# Altium PCB praline.PcbDoc (part 1 of 6)
Units mm, origin at the board's own origin, x right, y up, seen from the top; angles counter-clockwise.
Board outline 120 x 75 mm, 6 copper layers (F.Cu, In1.Cu, In2.Cu, In3.Cu, In4.Cu, B.Cu); 576 components, 429 nets, 2806 pads, 953 vias.
Unrouted connection lines stored in the file: 268.
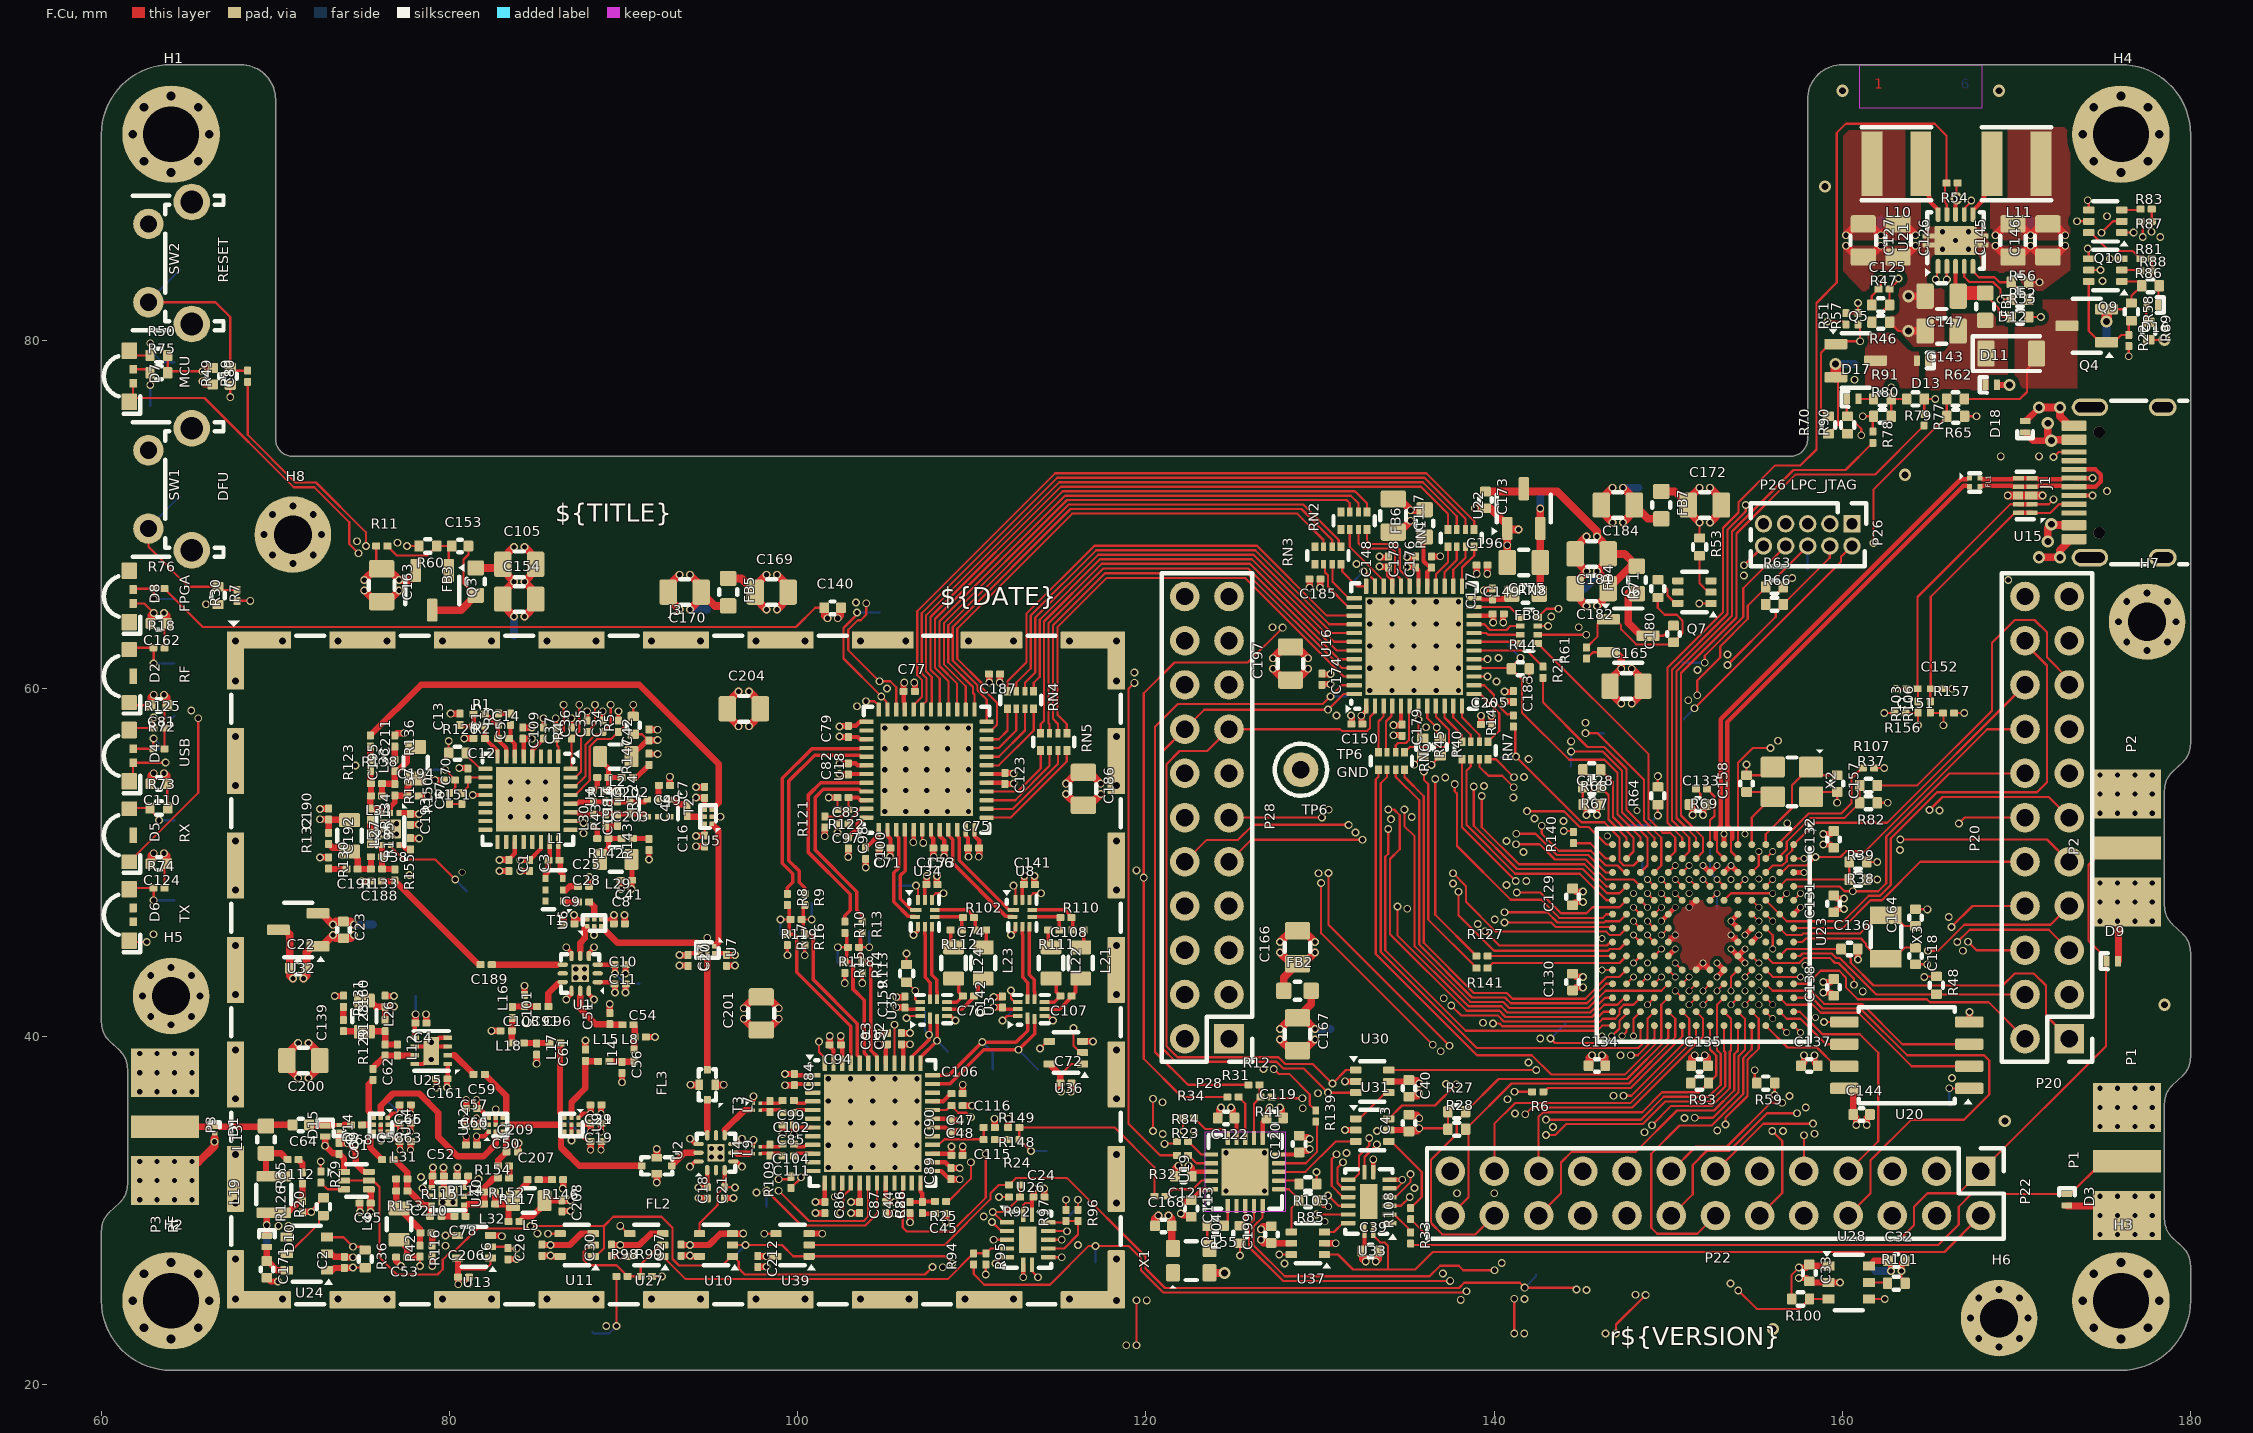
[diagram p0: F.Cu view]
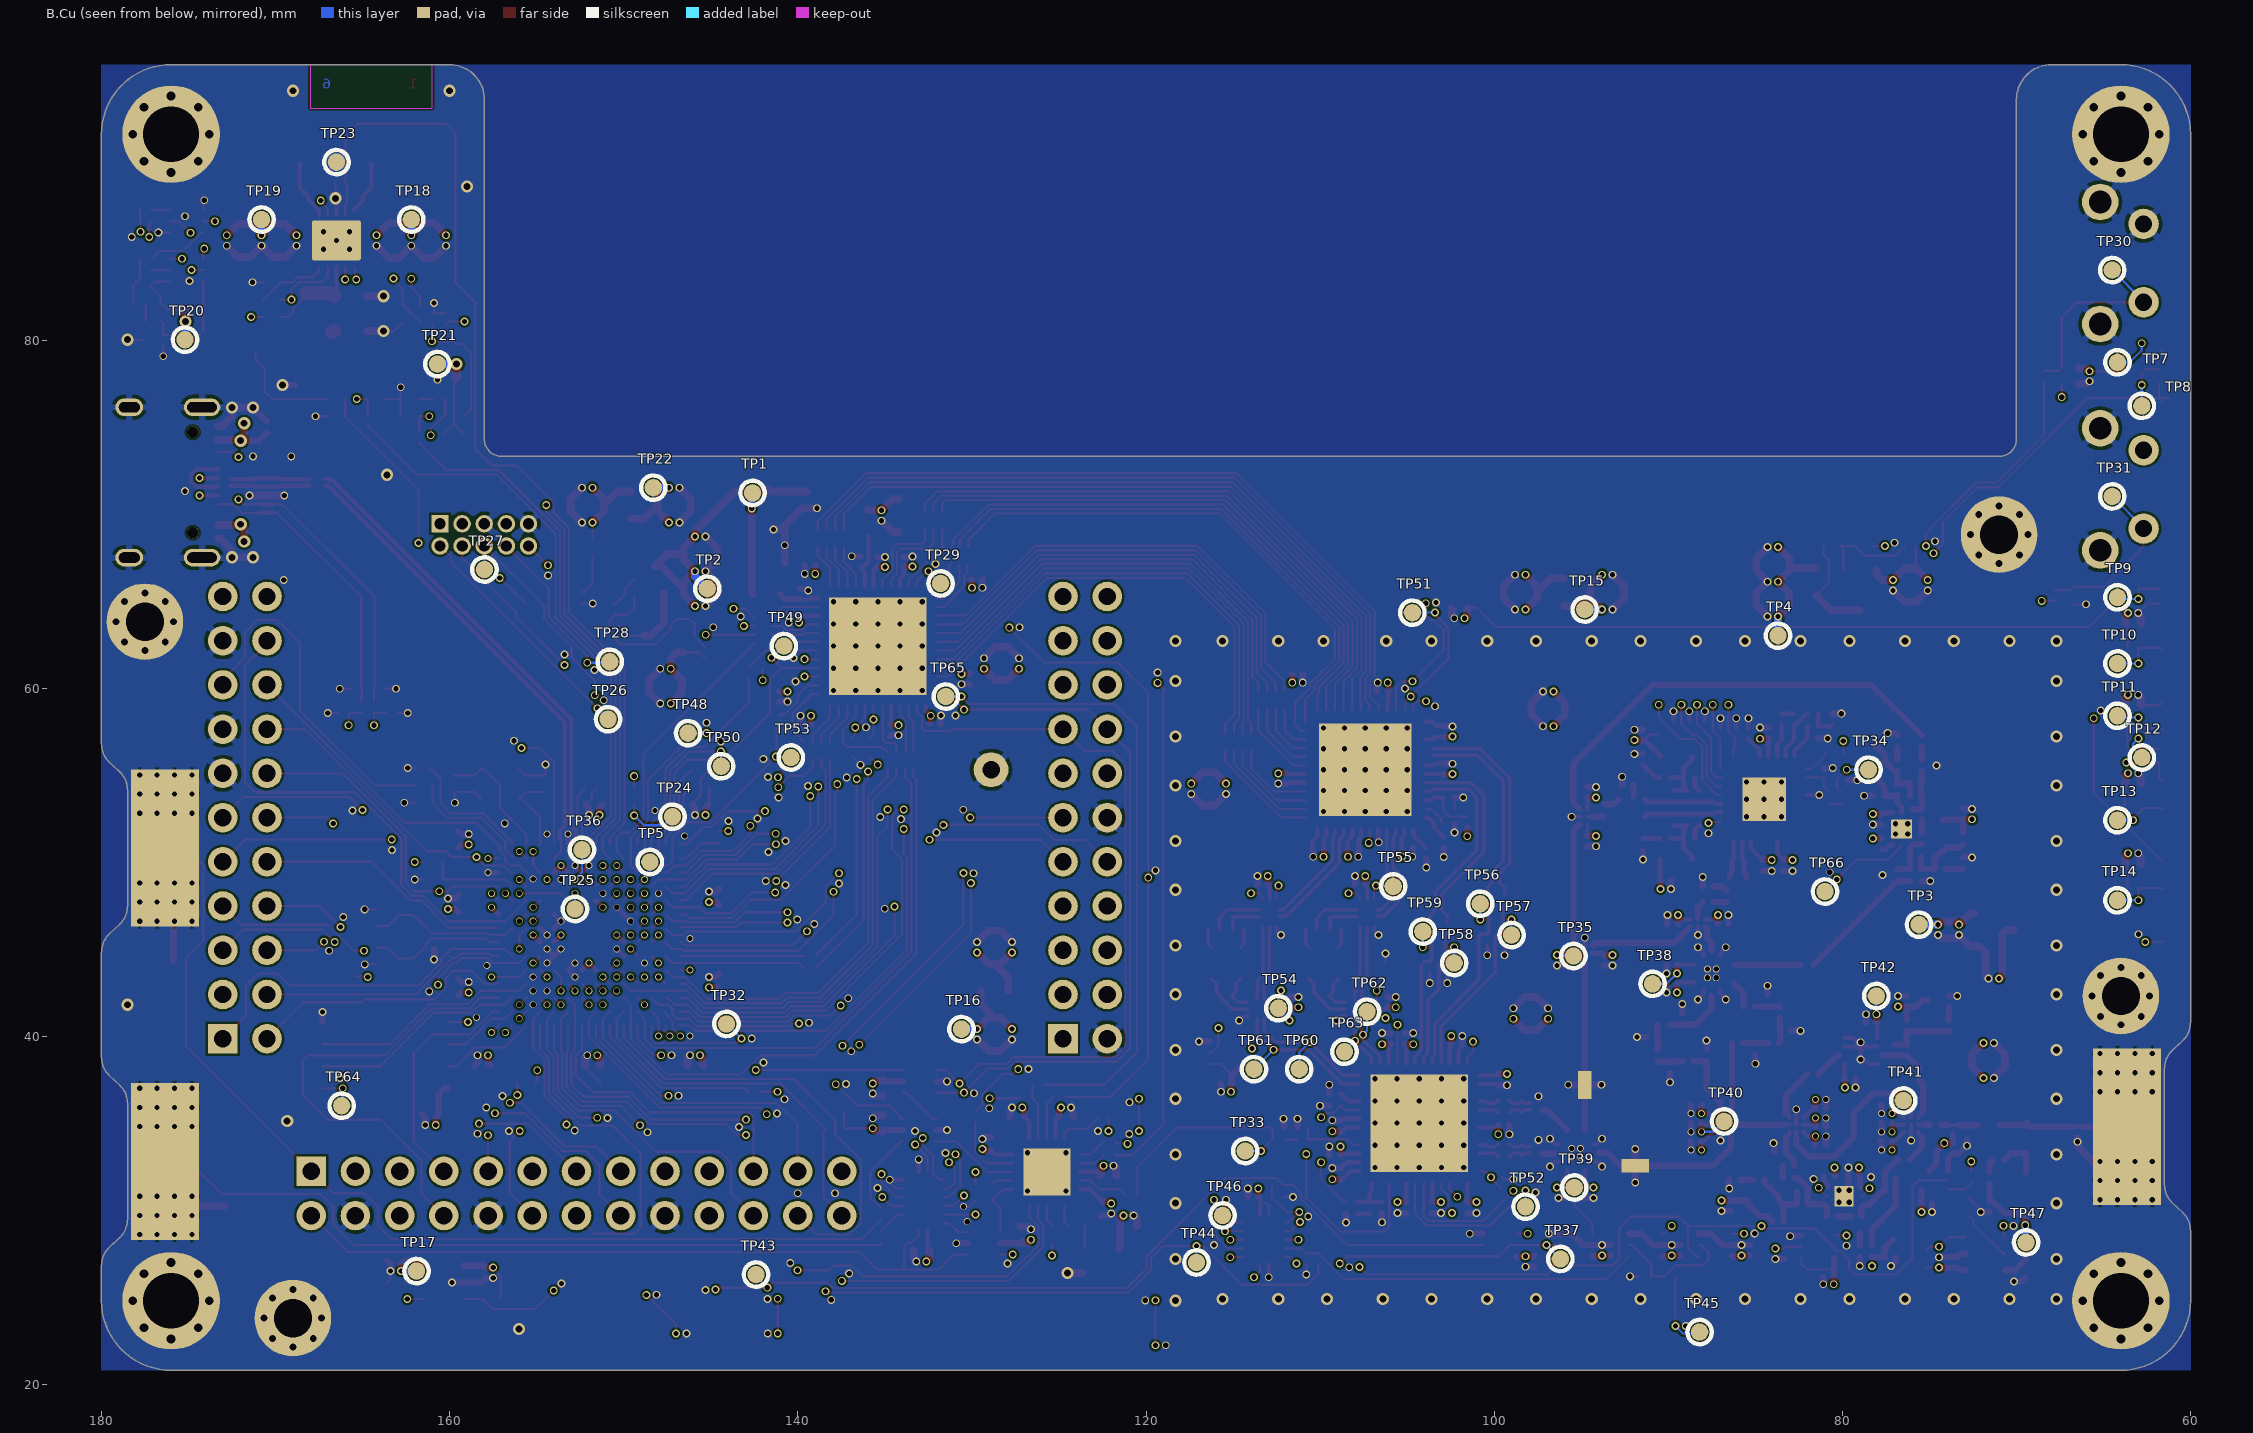
[diagram p1: B.Cu view, seen from below]
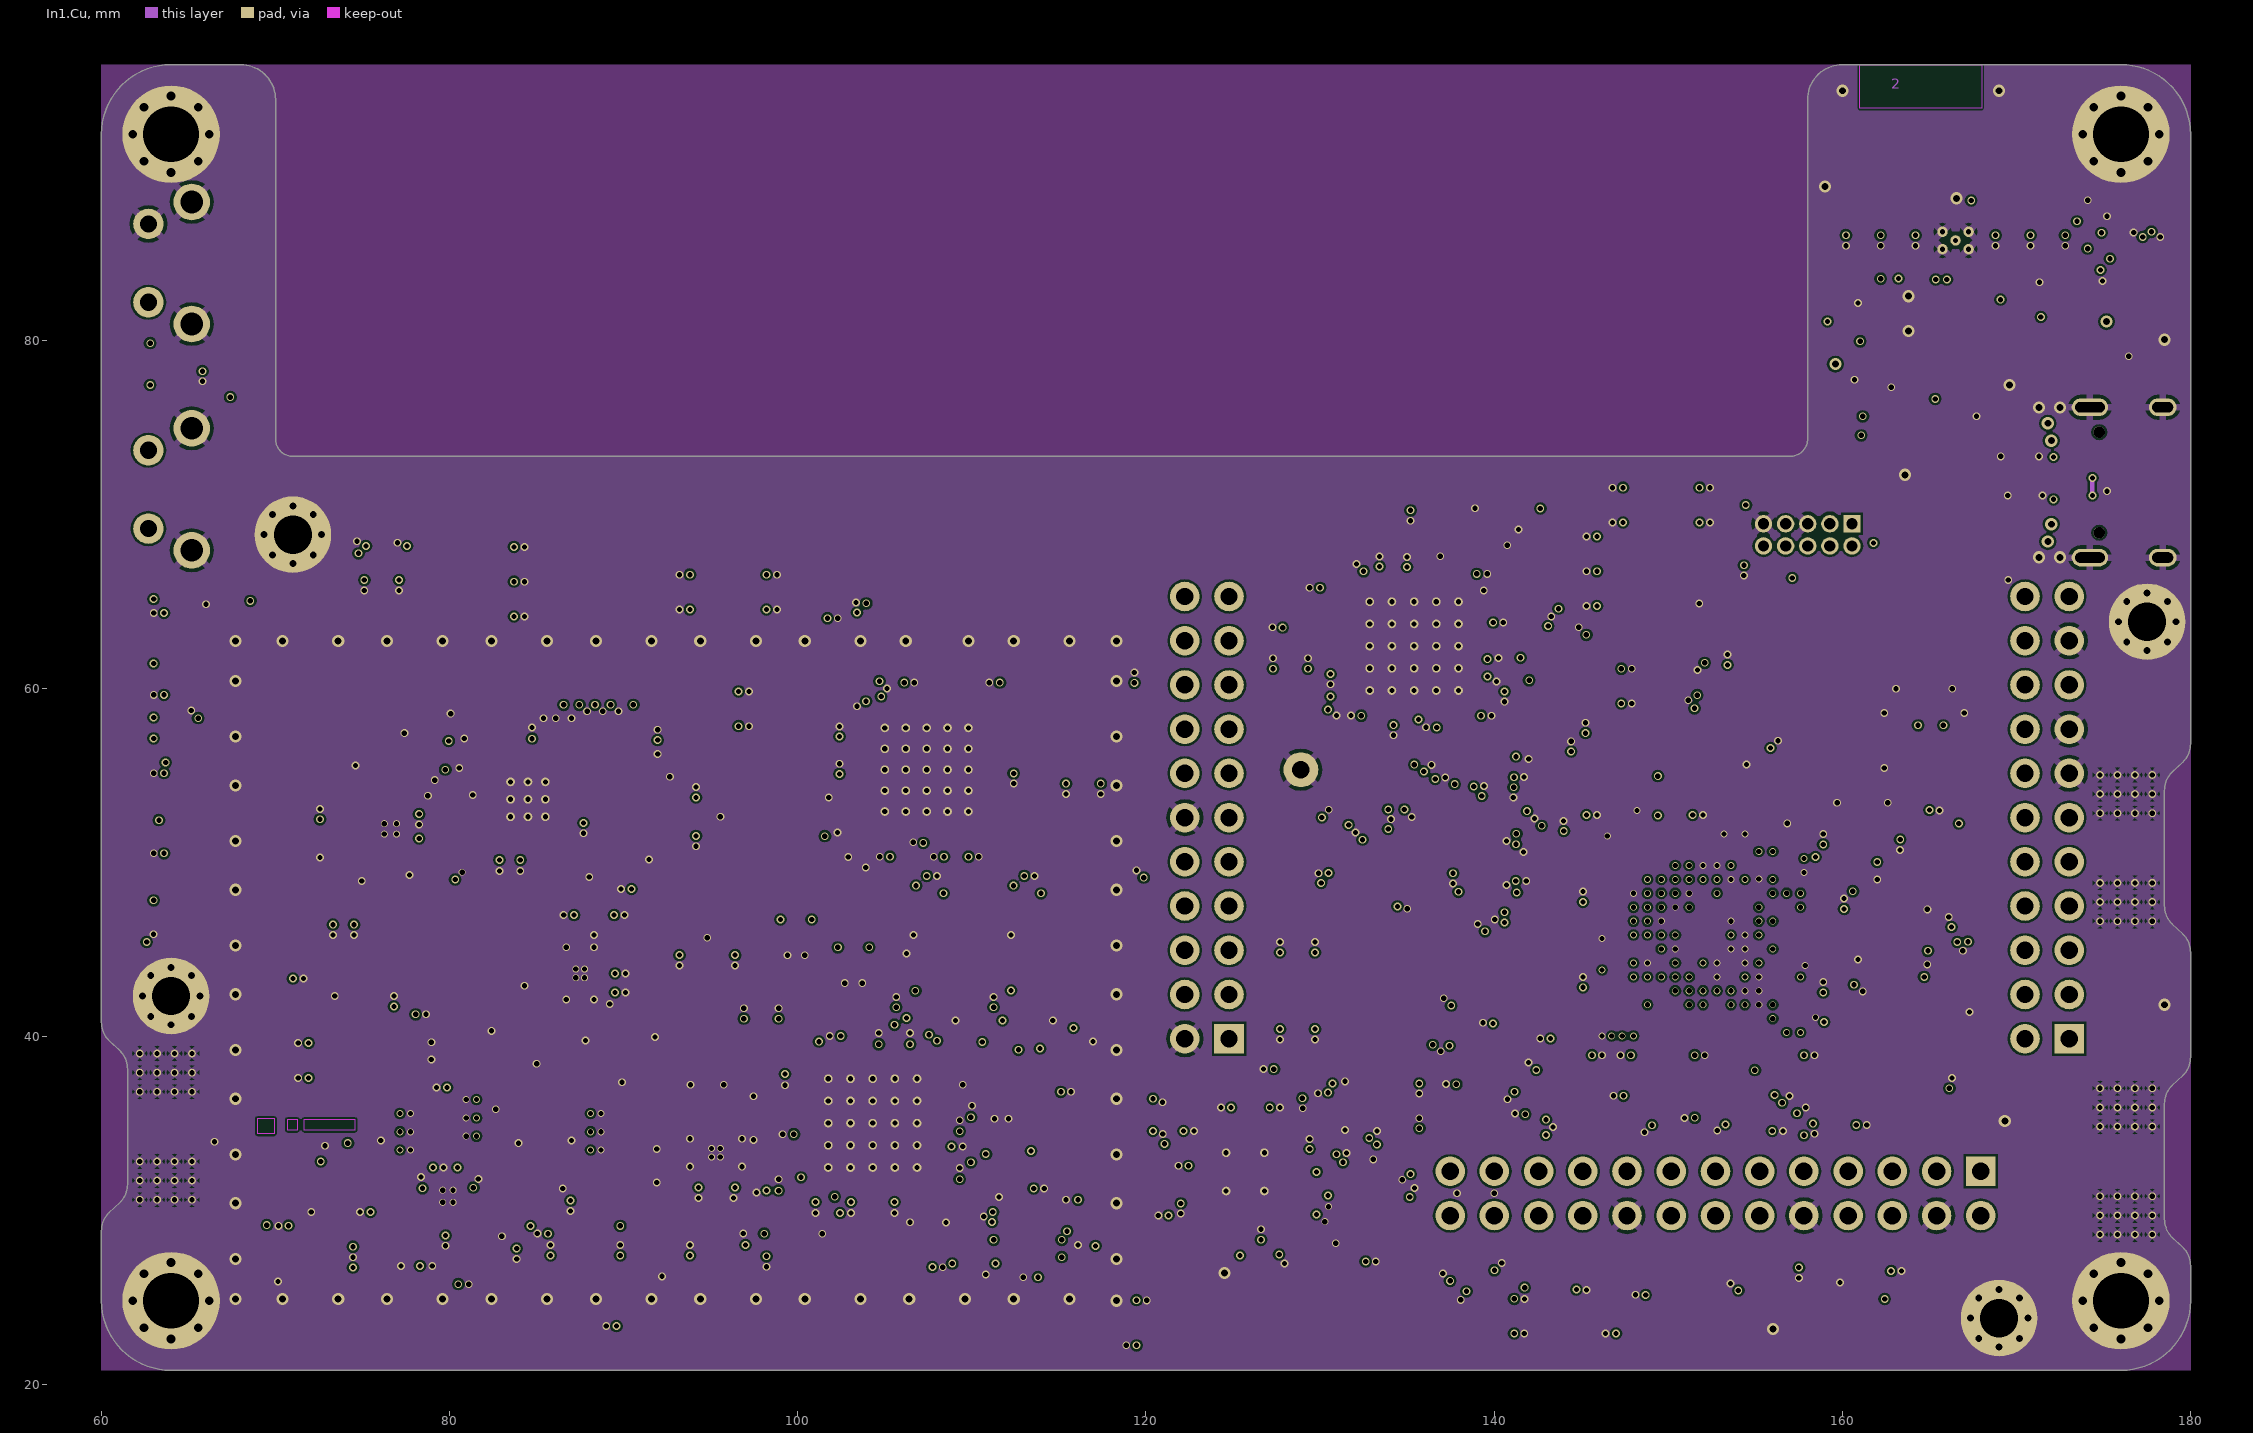
[diagram p2: In1.Cu]
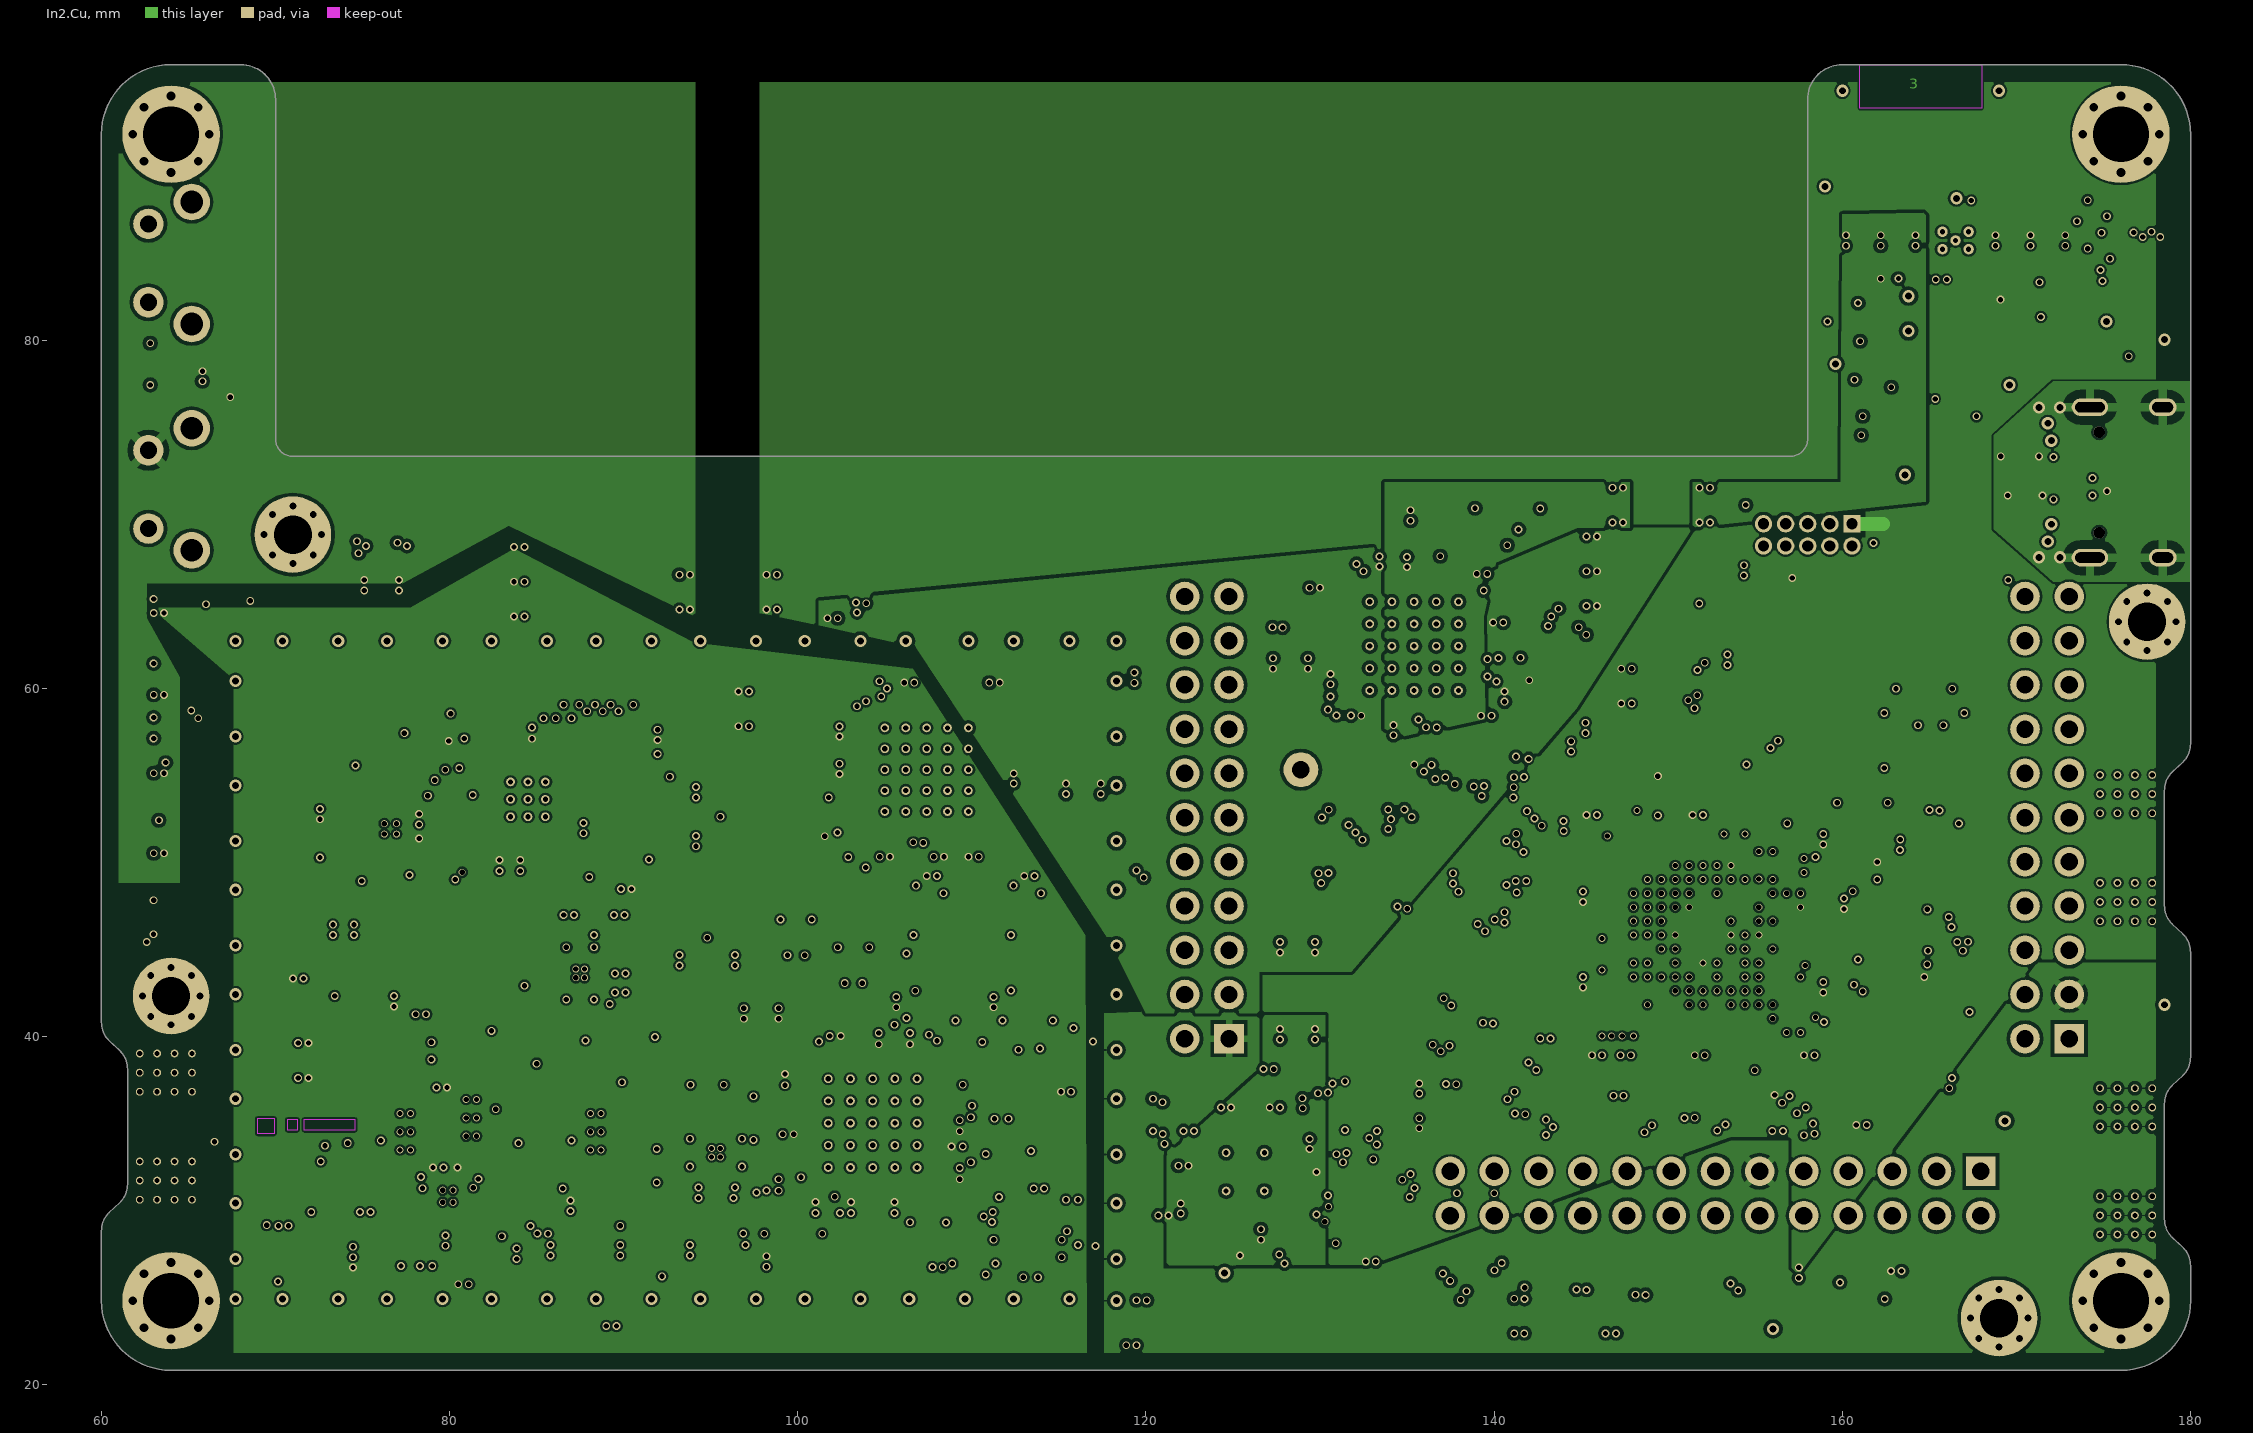
[diagram p3: In2.Cu]
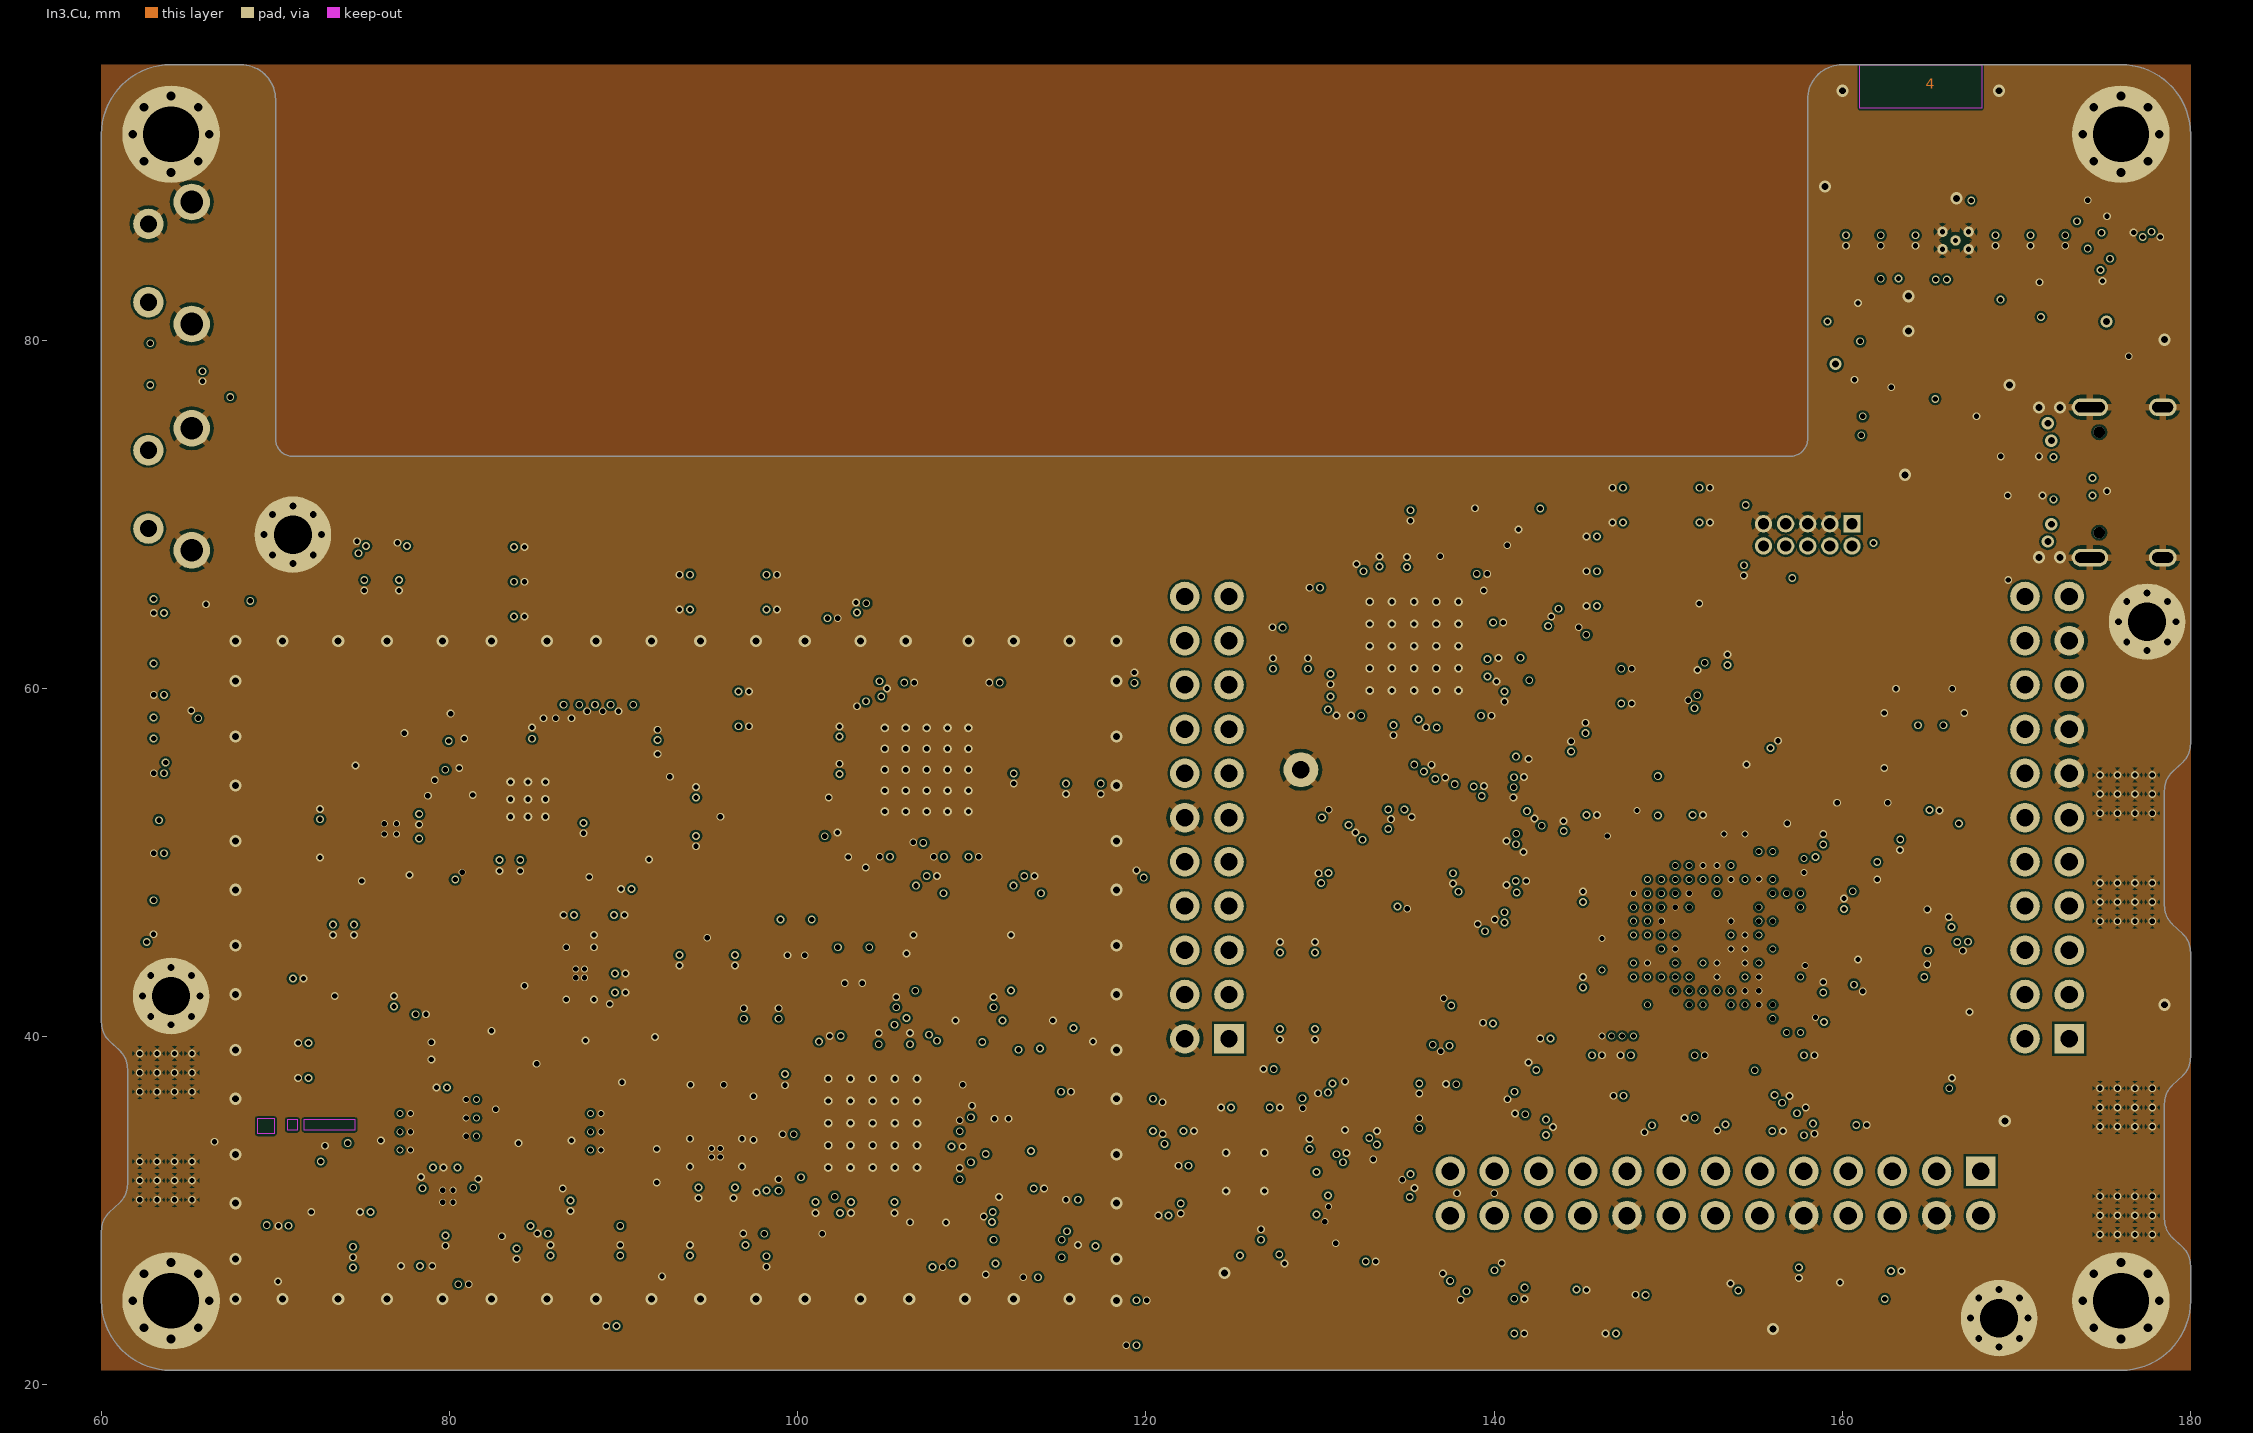
[diagram p4: In3.Cu]
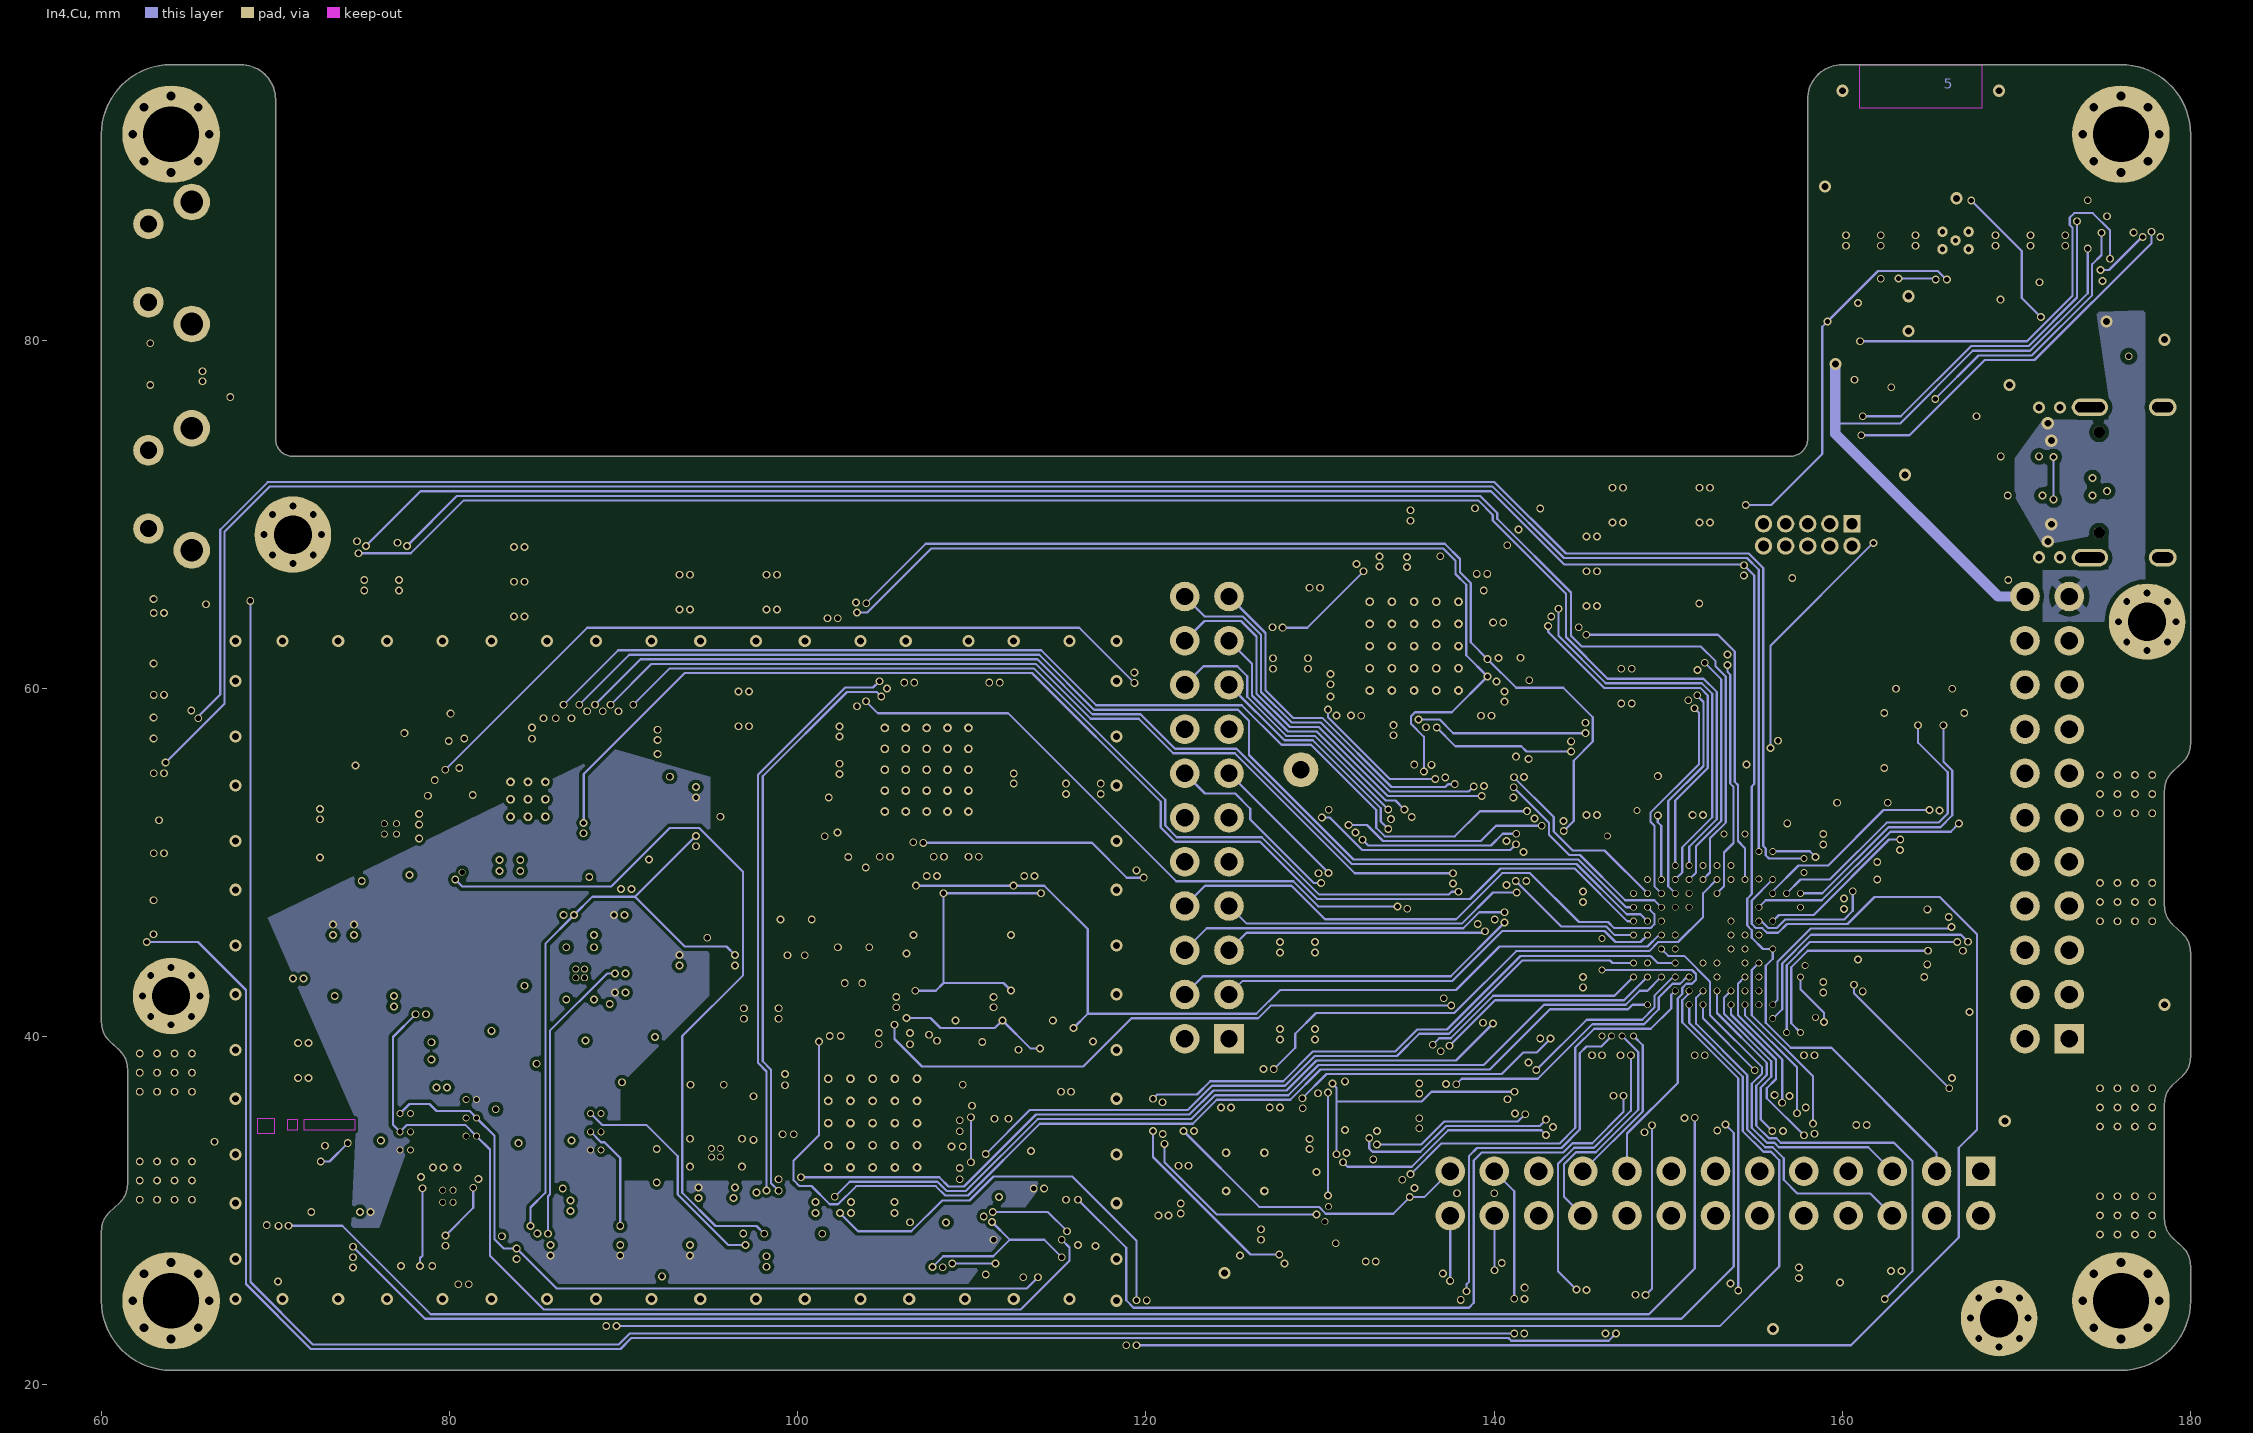
[diagram p5: In4.Cu]

## Layer stack, top to bottom
F.Mask: solder mask 0.0102, Solder Resist, Dk 3.5
F.Cu: signal copper 0.0356
Dielectric3: dielectric 0.32, FR-4, Dk 4.8
In1.Cu: signal copper 0.0356
Dielectric 1: dielectric 0.32, FR-4, Dk 4.8
In2.Cu: signal copper 0.0356
Dielectric2: dielectric 0.32, FR-4, Dk 4.8
In3.Cu: signal copper 0.0356
Dielectric4: dielectric 0.32, FR-4, Dk 4.8
In4.Cu: signal copper 0.0356
Dielectric5: dielectric 0.32, FR-4, Dk 4.8
B.Cu: signal copper 0.0356
B.Mask: solder mask 0.0102, Solder Resist, Dk 3.5

## Board outline
60,28.82 cw(c61.5,28.82) 60.439,29.881 61.061,30.459 ccw(c60,31.52) 61.5,31.52 61.5,38.12 ccw(c60,38.12) 61.061,39.181 60.439,39.759 cw(c61.5,40.82) 60,40.82 60,91.82 cw(c64,91.82) 64,95.82 68,95.82 cw(c68,93.82) 70,93.82 70,74.32 ccw(c71,74.32) 71,73.32 157,73.32 ccw(c157,74.32) 158,74.32 158,93.82 cw(c160,93.82) 160,95.82 176,95.82 cw(c176,91.82) 180,91.82 180,56.82 cw(c178.5,56.82) 179.561,55.759 178.939,55.181 ccw(c180,54.12) 178.5,54.12 178.5,47.52 ccw(c180,47.52) 178.939,46.459 179.561,45.881 cw(c178.5,44.82) 180,44.82 180,38.82 cw(c178.5,38.82) 179.561,37.759 178.939,37.181 ccw(c180,36.12) 178.5,36.12 178.5,29.52 ccw(c180,29.52) 178.939,28.459 179.561,27.881 cw(c178.5,26.82) 180,26.82 180,24.82 cw(c176,24.82) 176,20.82 64,20.82 cw(c64,24.82) 60,24.82

## Design rules (kind name [scope] priority, off if disabled: settings)
Clearance "Clearence 0.5_PadClass" [InPadClass('Pad Class Clearance 0.5')] p1: gap=0.5 ignorepadtopadclearanceinfootprint=FALSE
Clearance "Clearence 0.3_Polygon" [InNamedPolygon('F.Cu-VCC') OR InNamedPolygon('F.Cu-+1V2') OR InNamedPolygon('F.Cu-GND')] p2: gap=0.3 ignorepadtopadclearanceinfootprint=FALSE
Clearance "Clearence 0.25_Polygon" [InNamedPolygon('F.Cu-Net-(D13-A)') OR InNamedPolygon('F.Cu-Net-(D11-K)') OR InNamedPolygon('F.Cu-/Microcontroller/VBUS_SAFE') OR InNamedPolygon('In4.Cu-/Power/VBUS')] p3: gap=0.25 ignorepadtopadclearanceinfootprint=FALSE
Clearance "Clearence 0.2_Polygon" [InNamedPolygon('F.Cu-VCC-1') OR InNamedPolygon('In2.Cu-3V3AUX') OR InNamedPolygon('In2.Cu-+1V2') OR InNamedPolygon('In2.Cu-3V3LED') OR InNamedPolygon('In2.Cu-1V2FPGA') OR InNamedPolygon('In2.Cu-3V3CLK') OR InNamedPolygon('In2.Cu-3V3FPGA') OR InNamedPolygon('In4.Cu-2V5RF')] p4: gap=0.2 ignorepadtopadclearanceinfootprint=FALSE
Clearance "Clearence 0.127_Polygon" [InNamedPolygon('B.Cu-GND') OR InNamedPolygon('In1.Cu-GND') OR InNamedPolygon('In3.Cu-GND') OR InNamedPolygon('In2.Cu-VCC') OR InNamedPolygon('In2.Cu-VAA') OR InNamedPolygon('In2.Cu-GND')] p5: gap=0.127 ignorepadtopadclearanceinfootprint=FALSE
Clearance "Clearence 0.127_NetClass" [InNetClass('Default') OR InNetClass('diff100') OR InNetClass('diff90')] p6: gap=0.127 ignorepadtopadclearanceinfootprint=FALSE
Clearance "Clearence 0.05_PadClass" [InPadClass('Pad Class Clearance 0.05')] p7: gap=0.05 ignorepadtopadclearanceinfootprint=FALSE
Clearance "Clearence 0.04_PadClass" [InPadClass('Pad Class Clearance 0.04')] p8: gap=0.04 ignorepadtopadclearanceinfootprint=FALSE
HoleSize HoleSize_MT-Hole [InComponentClass('CC-MT-HOLE')] p1: absolutevalues=TRUE maxlimit=4 minlimit=0.254 maxpercent=80.000 minpercent=20.000
HoleSize [All] p2: absolutevalues=TRUE maxlimit=2.54 minlimit=0.025 maxpercent=80.000 minpercent=20.000
HoleToHoleClearance HoleToHoleClearance_1 [IsComponentPad] p1: gap=0.2 allowstackedmicrovias=TRUE
HoleToHoleClearance [All] p2: gap=0.254 allowstackedmicrovias=TRUE
MinimumSolderMaskSliver [All] p1: minsoldermaskwidth=0
PolygonConnect Polygon_In4.Cu-2V5RF_ConnectDirect [IsNamedPolygon('In4.Cu-2V5RF') vs IsVia or IsSMTPin] p1: connectstyle=Direct reliefconductorwidth=0.254 reliefentries=4 polygonreliefangle="90 Angle" airgapwidth=0.254
PolygonConnect Polygon_In4.Cu-2V5RF_ConnectRelief45 [IsNamedPolygon('In4.Cu-2V5RF') vs IsThruPin and (PadShape_AllLayers = 'Round')] p2: connectstyle=Relief reliefconductorwidth=0.5 reliefentries=4 polygonreliefangle="45 Angle" airgapwidth=0.5
PolygonConnect Polygon_In4.Cu-2V5RF_ConnectRelief90 [IsNamedPolygon('In4.Cu-2V5RF') vs IsThruPin and (PadShape_AllLayers <> 'Round')] p3: connectstyle=Relief reliefconductorwidth=0.5 reliefentries=4 polygonreliefangle="90 Angle" airgapwidth=0.5
PolygonConnect Polygon_In4.Cu-/Power/VBUS_ConnectDirect [IsNamedPolygon('In4.Cu-/Power/VBUS') vs IsVia] p4: connectstyle=Direct reliefconductorwidth=0.254 reliefentries=4 polygonreliefangle="90 Angle" airgapwidth=0.254
PolygonConnect Polygon_In4.Cu-/Power/VBUS_ConnectRelief45 [IsNamedPolygon('In4.Cu-/Power/VBUS') vs (IsThruPin or IsSMTPin) and (PadShape_AllLayers = 'Round')] p5: connectstyle=Relief reliefconductorwidth=0.5 reliefentries=4 polygonreliefangle="45 Angle" airgapwidth=0.3
PolygonConnect Polygon_In4.Cu-/Power/VBUS_ConnectRelief90 [IsNamedPolygon('In4.Cu-/Power/VBUS') vs (IsThruPin or IsSMTPin) and (PadShape_AllLayers <> 'Round')] p6: connectstyle=Relief reliefconductorwidth=0.5 reliefentries=4 polygonreliefangle="90 Angle" airgapwidth=0.3
PolygonConnect Polygon_In2.Cu-3V3FPGA_ConnectDirect [IsNamedPolygon('In2.Cu-3V3FPGA') vs IsVia] p7: connectstyle=Direct reliefconductorwidth=0.254 reliefentries=4 polygonreliefangle="90 Angle" airgapwidth=0.254
PolygonConnect Polygon_In2.Cu-3V3FPGA_ConnectRelief45 [IsNamedPolygon('In2.Cu-3V3FPGA') vs (IsThruPin or IsSMTPin) and (PadShape_AllLayers = 'Round')] p8: connectstyle=Relief reliefconductorwidth=0.5 reliefentries=4 polygonreliefangle="45 Angle" airgapwidth=0.5
PolygonConnect Polygon_In2.Cu-3V3FPGA_ConnectRelief90 [IsNamedPolygon('In2.Cu-3V3FPGA') vs (IsThruPin or IsSMTPin) and (PadShape_AllLayers <> 'Round')] p9: connectstyle=Relief reliefconductorwidth=0.5 reliefentries=4 polygonreliefangle="90 Angle" airgapwidth=0.5
PolygonConnect Polygon_In2.Cu-3V3CLK_ConnectDirect [IsNamedPolygon('In2.Cu-3V3CLK') vs IsVia] p10: connectstyle=Direct reliefconductorwidth=0.254 reliefentries=4 polygonreliefangle="90 Angle" airgapwidth=0.254
PolygonConnect Polygon_In2.Cu-3V3CLK_ConnectRelief45 [IsNamedPolygon('In2.Cu-3V3CLK') vs (IsThruPin or IsSMTPin) and (PadShape_AllLayers = 'Round')] p11: connectstyle=Relief reliefconductorwidth=0.5 reliefentries=4 polygonreliefangle="45 Angle" airgapwidth=0.5
PolygonConnect Polygon_In2.Cu-3V3CLK_ConnectRelief90 [IsNamedPolygon('In2.Cu-3V3CLK') vs (IsThruPin or IsSMTPin) and (PadShape_AllLayers <> 'Round')] p12: connectstyle=Relief reliefconductorwidth=0.5 reliefentries=4 polygonreliefangle="90 Angle" airgapwidth=0.5
PolygonConnect Polygon_In2.Cu-1V2FPGA_ConnectDirect [IsNamedPolygon('In2.Cu-1V2FPGA') vs IsVia] p13: connectstyle=Direct reliefconductorwidth=0.254 reliefentries=4 polygonreliefangle="90 Angle" airgapwidth=0.254
PolygonConnect Polygon_In2.Cu-1V2FPGA_ConnectRelief45 [IsNamedPolygon('In2.Cu-1V2FPGA') vs (IsThruPin or IsSMTPin) and (PadShape_AllLayers = 'Round')] p14: connectstyle=Relief reliefconductorwidth=0.5 reliefentries=4 polygonreliefangle="45 Angle" airgapwidth=0.5
PolygonConnect Polygon_In2.Cu-1V2FPGA_ConnectRelief90 [IsNamedPolygon('In2.Cu-1V2FPGA') vs (IsThruPin or IsSMTPin) and (PadShape_AllLayers <> 'Round')] p15: connectstyle=Relief reliefconductorwidth=0.5 reliefentries=4 polygonreliefangle="90 Angle" airgapwidth=0.5
PolygonConnect Polygon_In2.Cu-3V3LED_ConnectDirect [IsNamedPolygon('In2.Cu-3V3LED') vs IsVia] p16: connectstyle=Direct reliefconductorwidth=0.254 reliefentries=4 polygonreliefangle="90 Angle" airgapwidth=0.254
PolygonConnect Polygon_In2.Cu-3V3LED_ConnectRelief45 [IsNamedPolygon('In2.Cu-3V3LED') vs (IsThruPin or IsSMTPin) and (PadShape_AllLayers = 'Round')] p17: connectstyle=Relief reliefconductorwidth=0.508 reliefentries=4 polygonreliefangle="45 Angle" airgapwidth=0.305
PolygonConnect Polygon_In2.Cu-3V3LED_ConnectRelief90 [IsNamedPolygon('In2.Cu-3V3LED') vs (IsThruPin or IsSMTPin) and (PadShape_AllLayers <> 'Round')] p18: connectstyle=Relief reliefconductorwidth=0.508 reliefentries=4 polygonreliefangle="90 Angle" airgapwidth=0.305
PolygonConnect Polygon_In2.Cu-GND_ConnectDirect [IsNamedPolygon('In2.Cu-GND') vs IsVia or IsSMTPin] p19: connectstyle=Direct reliefconductorwidth=0.254 reliefentries=4 polygonreliefangle="90 Angle" airgapwidth=0.254
PolygonConnect Polygon_In2.Cu-GND_ConnectRelief45 [IsNamedPolygon('In2.Cu-GND') vs IsThruPin and (PadShape_AllLayers = 'Round')] p20: connectstyle=Relief reliefconductorwidth=0.5 reliefentries=4 polygonreliefangle="45 Angle" airgapwidth=0.5
PolygonConnect Polygon_In2.Cu-GND_ConnectRelief90 [IsNamedPolygon('In2.Cu-GND') vs IsThruPin and (PadShape_AllLayers <> 'Round')] p21: connectstyle=Relief reliefconductorwidth=0.5 reliefentries=4 polygonreliefangle="90 Angle" airgapwidth=0.5
PolygonConnect Polygon_In2.Cu-+1V2_ConnectDirect [IsNamedPolygon('In2.Cu-+1V2') vs IsVia] p22: connectstyle=Direct reliefconductorwidth=0.254 reliefentries=4 polygonreliefangle="90 Angle" airgapwidth=0.254
PolygonConnect Polygon_In2.Cu-+1V2_ConnectRelief45 [IsNamedPolygon('In2.Cu-+1V2') vs (IsThruPin or IsSMTPin) and (PadShape_AllLayers = 'Round')] p23: connectstyle=Relief reliefconductorwidth=0.5 reliefentries=4 polygonreliefangle="45 Angle" airgapwidth=0.5
PolygonConnect Polygon_In2.Cu-+1V2_ConnectRelief90 [IsNamedPolygon('In2.Cu-+1V2') vs (IsThruPin or IsSMTPin) and (PadShape_AllLayers <> 'Round')] p24: connectstyle=Relief reliefconductorwidth=0.5 reliefentries=4 polygonreliefangle="90 Angle" airgapwidth=0.5
PolygonConnect Polygon_In2.Cu-3V3AUX_ConnectDirect [IsNamedPolygon('In2.Cu-3V3AUX') vs IsVia or IsSMTPin] p25: connectstyle=Direct reliefconductorwidth=0.254 reliefentries=4 polygonreliefangle="90 Angle" airgapwidth=0.254
PolygonConnect Polygon_In2.Cu-3V3AUX_ConnectRelief45 [IsNamedPolygon('In2.Cu-3V3AUX') vs IsThruPin and (PadShape_AllLayers = 'Round')] p26: connectstyle=Relief reliefconductorwidth=0.4 reliefentries=4 polygonreliefangle="45 Angle" airgapwidth=0.2
PolygonConnect Polygon_In2.Cu-3V3AUX_ConnectRelief90 [IsNamedPolygon('In2.Cu-3V3AUX') vs IsThruPin and (PadShape_AllLayers <> 'Round')] p27: connectstyle=Relief reliefconductorwidth=0.4 reliefentries=4 polygonreliefangle="90 Angle" airgapwidth=0.2
PolygonConnect Polygon_In2.Cu-VAA_ConnectDirect [IsNamedPolygon('In2.Cu-VAA') vs IsVia] p28: connectstyle=Direct reliefconductorwidth=0.254 reliefentries=4 polygonreliefangle="90 Angle" airgapwidth=0.254
PolygonConnect Polygon_In2.Cu-VAA_ConnectRelief45 [IsNamedPolygon('In2.Cu-VAA') vs (IsThruPin or IsSMTPin) and (PadShape_AllLayers = 'Round')] p29: connectstyle=Relief reliefconductorwidth=0.508 reliefentries=4 polygonreliefangle="45 Angle" airgapwidth=0.305
PolygonConnect Polygon_In2.Cu-VAA_ConnectRelief90 [IsNamedPolygon('In2.Cu-VAA') vs (IsThruPin or IsSMTPin) and (PadShape_AllLayers <> 'Round')] p30: connectstyle=Relief reliefconductorwidth=0.508 reliefentries=4 polygonreliefangle="90 Angle" airgapwidth=0.305
PolygonConnect Polygon_In2.Cu-VCC_ConnectDirect [IsNamedPolygon('In2.Cu-VCC') vs IsVia] p31: connectstyle=Direct reliefconductorwidth=0.254 reliefentries=4 polygonreliefangle="90 Angle" airgapwidth=0.254
PolygonConnect Polygon_In2.Cu-VCC_ConnectRelief45 [IsNamedPolygon('In2.Cu-VCC') vs (IsThruPin or IsSMTPin) and (PadShape_AllLayers = 'Round')] p32: connectstyle=Relief reliefconductorwidth=0.508 reliefentries=4 polygonreliefangle="45 Angle" airgapwidth=0.305
PolygonConnect Polygon_In2.Cu-VCC_ConnectRelief90 [IsNamedPolygon('In2.Cu-VCC') vs (IsThruPin or IsSMTPin) and (PadShape_AllLayers <> 'Round')] p33: connectstyle=Relief reliefconductorwidth=0.508 reliefentries=4 polygonreliefangle="90 Angle" airgapwidth=0.305
PolygonConnect Polygon_In3.Cu-GND_ConnectDirect [IsNamedPolygon('In3.Cu-GND') vs IsVia or IsSMTPin] p34: connectstyle=Direct reliefconductorwidth=0.254 reliefentries=4 polygonreliefangle="90 Angle" airgapwidth=0.254
PolygonConnect Polygon_In3.Cu-GND_ConnectRelief45 [IsNamedPolygon('In3.Cu-GND') vs IsThruPin and (PadShape_AllLayers = 'Round')] p35: connectstyle=Relief reliefconductorwidth=0.4 reliefentries=4 polygonreliefangle="45 Angle" airgapwidth=0.2
PolygonConnect Polygon_In3.Cu-GND_ConnectRelief90 [IsNamedPolygon('In3.Cu-GND') vs IsThruPin and (PadShape_AllLayers <> 'Round')] p36: connectstyle=Relief reliefconductorwidth=0.4 reliefentries=4 polygonreliefangle="90 Angle" airgapwidth=0.2
PolygonConnect Polygon_In1.Cu-GND_ConnectDirect [IsNamedPolygon('In1.Cu-GND') vs IsVia or IsSMTPin] p37: connectstyle=Direct reliefconductorwidth=0.254 reliefentries=4 polygonreliefangle="90 Angle" airgapwidth=0.254
PolygonConnect Polygon_In1.Cu-GND_ConnectRelief45 [IsNamedPolygon('In1.Cu-GND') vs IsThruPin and (PadShape_AllLayers = 'Round')] p38: connectstyle=Relief reliefconductorwidth=0.4 reliefentries=4 polygonreliefangle="45 Angle" airgapwidth=0.2
PolygonConnect Polygon_In1.Cu-GND_ConnectRelief90 [IsNamedPolygon('In1.Cu-GND') vs IsThruPin and (PadShape_AllLayers <> 'Round')] p39: connectstyle=Relief reliefconductorwidth=0.4 reliefentries=4 polygonreliefangle="90 Angle" airgapwidth=0.2
PolygonConnect Polygon_B.Cu-GND_ConnectDirect [IsNamedPolygon('B.Cu-GND') vs IsVia or IsSMTPin] p40: connectstyle=Direct reliefconductorwidth=0.254 reliefentries=4 polygonreliefangle="90 Angle" airgapwidth=0.254
PolygonConnect Polygon_B.Cu-GND_ConnectRelief45 [IsNamedPolygon('B.Cu-GND') vs IsThruPin and (PadShape_AllLayers = 'Round')] p41: connectstyle=Relief reliefconductorwidth=0.4 reliefentries=4 polygonreliefangle="45 Angle" airgapwidth=0.2
PolygonConnect Polygon_B.Cu-GND_ConnectRelief90 [IsNamedPolygon('B.Cu-GND') vs IsThruPin and (PadShape_AllLayers <> 'Round')] p42: connectstyle=Relief reliefconductorwidth=0.4 reliefentries=4 polygonreliefangle="90 Angle" airgapwidth=0.2
PolygonConnect Polygon_F.Cu-GND_ConnectDirect [IsNamedPolygon('F.Cu-GND')] p43: connectstyle=Direct reliefconductorwidth=0.254 reliefentries=4 polygonreliefangle="90 Angle" airgapwidth=0.254
PolygonConnect Polygon_F.Cu-/Microcontroller/VBUS_SAFE_ConnectDirect [IsNamedPolygon('F.Cu-/Microcontroller/VBUS_SAFE')] p44: connectstyle=Direct reliefconductorwidth=0.254 reliefentries=4 polygonreliefangle="90 Angle" airgapwidth=0.254
PolygonConnect Polygon_F.Cu-+1V2_ConnectDirect [IsNamedPolygon('F.Cu-+1V2')] p45: connectstyle=Direct reliefconductorwidth=0.254 reliefentries=4 polygonreliefangle="90 Angle" airgapwidth=0.254
PolygonConnect Polygon_F.Cu-Net-(D11-K)_ConnectDirect [IsNamedPolygon('F.Cu-Net-(D11-K)')] p46: connectstyle=Direct reliefconductorwidth=0.254 reliefentries=4 polygonreliefangle="90 Angle" airgapwidth=0.254
PolygonConnect Polygon_F.Cu-VCC-1_ConnectDirect [IsNamedPolygon('F.Cu-VCC-1')] p47: connectstyle=Direct reliefconductorwidth=0.254 reliefentries=4 polygonreliefangle="90 Angle" airgapwidth=0.254
PolygonConnect Polygon_F.Cu-VCC_ConnectDirect [IsNamedPolygon('F.Cu-VCC')] p48: connectstyle=Direct reliefconductorwidth=0.254 reliefentries=4 polygonreliefangle="90 Angle" airgapwidth=0.254
PolygonConnect Polygon_F.Cu-Net-(D13-A)_ConnectDirect [IsNamedPolygon('F.Cu-Net-(D13-A)')] p49: connectstyle=Direct reliefconductorwidth=0.254 reliefentries=4 polygonreliefangle="90 Angle" airgapwidth=0.254
RoutingVias [All] p1: holewidth=0.711 width=1.27 viastyle="Through Hole" minholewidth=0.711 minwidth=1.27 maxholewidth=0.711 maxwidth=1.27
SilkToSilkClearance [All] p1: silktosilkclearance=0
SilkToSolderMaskClearance [IsPad] p1: minsilkscreentomaskgap=0 clearancetoexposedcopper=TRUE
SolderMaskExpansion [All] p1: expansion=0 istentingtop=FALSE
SupplyNets "Schematic Supply Nets_12" [InNet('+5V')] p1: voltage=0.000
SupplyNets "Schematic Supply Nets_11" [InNet('VCC')] p2: voltage=0.000
SupplyNets "Schematic Supply Nets_10" [InNet('2V5FPGA')] p3: voltage=0.000
SupplyNets "Schematic Supply Nets_9" [InNet('1V2FPGA')] p4: voltage=0.000
SupplyNets "Schematic Supply Nets_8" [InNet('3V3FPGA')] p5: voltage=0.000
SupplyNets "Schematic Supply Nets_7" [InNet('3V3LED')] p6: voltage=0.000
SupplyNets "Schematic Supply Nets_6" [InNet('2V5RF')] p7: voltage=0.000
SupplyNets "Schematic Supply Nets_5" [InNet('VAA')] p8: voltage=0.000
SupplyNets "Schematic Supply Nets_4" [InNet('GND')] p9: voltage=0.000
SupplyNets "Schematic Supply Nets_3" [InNet('3V3AUX')] p10: voltage=0.000
SupplyNets "Schematic Supply Nets_2" [InNet('+2V5')] p11: voltage=0.000
SupplyNets "Schematic Supply Nets_1" [InNet('+1V2')] p12: voltage=0.000
SupplyNets "Schematic Supply Nets" [InNet('3V3CLK')] p13: voltage=0.000
Width [All] p1: maxlimit=10 minlimit=0.127 preferedwidth=0.254
25 further rules are at their usual default settings.

## Classes and differential pairs
component class CC-MT-HOLE: H1 H2 H3 H4 H5 H6 H7 H8
component class USB: C151 C152 D18 FL1 J1 R103 R106 R156 R157 U15
component class "Switch Control": C24 C26 C27 C30 C212 R24 R92 R94 R95 R96 R97 R98 R99 TP35 TP37 TP38 TP39 TP40 TP41 TP42 TP43 TP44 TP45 TP46 TP66 U10 U11 U26 U27 U39
component class "RF Front End": C2 C4 C6 C50 C52 C53 C55 C57 C58 C59 C60 C62 C63 C64 C65 C66 C68 C69 C78 C95 C112 C139 C160 C161 C171 C200 C201 C204 C206 C207 C208 C209 C210 D1 D10 D14 D15 L4 L5 L12 L13 L19 L26 L31 L32 P3 Q1 R20 R29 R35 R36 R42 R114 R115 R116 R117 R126 R128 R129 R131 R146 R152 R153 R154 TP47 U12 U13 U14 U24 U25 U40
component class praline: H1 H2 H3 H4 H5 H6 H7 H8 J3
component class Power: C22 C23 C32 C33 C105 C125 C126 C127 C143 C145 C146 C147 C153 C154 C163 C165 C166 C167 C169 C170 C172 C173 C175 C180 C181 C182 C184 D11 D12 D13 D16 D17 FB1 FB2 FB3 FB4 FB5 FB7 L10 L11 Q3 Q4 Q5 Q6 Q7 Q9 Q10 R11 R22 R46 R47 R51 R52 R53 R54 R55 R56 R57 R58 R60 R61 R70 R71 R77 R78 R79 R80 R81 R83 R86 R87 R88 R89 R90 R91 R100 R101 TP1 TP2 TP3 TP4 TP6 TP15 TP16 TP17 TP18 TP19 TP20 TP21 TP22 TP23 U21 U22 U28 U32
component class Mixer: C1 C3 C5 C7 C8 C9 C12 C13 C14 C15 C16 C25 C28 C34 C35 C36 C37 C41 C42 C46 C49 C67 C70 C109 C114 C188 C189 C190 C191 C192 C193 C194 C195 C198 C202 C203 C211 L1 L2 L3 L6 L27 L28 L29 L30 L33 L34 R1 R2 R3 R4 R5 R43 R120 R123 R124 R130 R132 R133 R134 R135 R136 R137 R138 R142 R143 R144 R147 R150 R151 R155 T1 T2 U4 U5 U6 U38
component class Microcontroller: C80 C81 C110 C118 C124 C128 C129 C130 C131 C132 C133 C134 C135 C136 C137 C138 C140 C144 C157 C158 C162 C164 D2 D4 D5 D6 D7 D8 P20 P22 P26 P28 R6 R7 R18 R19 R30 R37 R38 R39 R48 R49 R50 R59 R62 R63 R64 R65 R66 R67 R68 R69 R72 R73 R74 R75 R76 R82 R93 R107 R125 R127 R140 R141 SW1 SW2 TP5 TP7 TP8 TP9 TP10 TP11 TP12 TP13 TP14 TP24 TP25 TP26 TP27 TP28 TP30 TP31 TP64 U20 U23 X2 X3
component class "Image Reject Filters": C10 C11 C19 C29 C31 C51 C54 C56 C61 C91 C96 C101 C103 L8 L14 L15 L16 L17 L18 U1 U9
component class "IF Transceiver": C17 C18 C20 C21 C44 C45 C47 C48 C84 C85 C86 C87 C88 C89 C90 C92 C93 C94 C99 C102 C104 C106 C111 C115 C116 FL2 FL3 L7 L9 R25 R26 R109 R148 R149 T3 T4 U2 U7 U17
component class FPGA: C117 C148 C149 C150 C174 C176 C177 C178 C179 C183 C185 C196 C197 C205 FB6 FB8 R21 R40 R44 R45 R145 RN1 RN2 RN3 RN4 RN5 RN6 RN7 RN8 TP48 TP49 TP50 TP51 TP52 TP53 U16
component class "Clock Generator": C39 C40 C43 C113 C119 C120 C121 C122 C155 C168 C199 D3 D9 P1 P2 R12 R23 R27 R28 R31 R32 R33 R34 R41 R84 R85 R104 R105 R108 R139 TP29 TP32 TP33 TP34 TP36 TP65 U19 U30 U31 U33 U37 X1
component class "ADC, DAC": C71 C72 C73 C74 C75 C76 C77 C79 C82 C83 C97 C98 C100 C107 C108 C123 C141 C142 C156 C159 C186 C187 L21 L22 L23 L24 R8 R9 R10 R13 R14 R15 R16 R17 R102 R110 R111 R112 R113 R118 R119 R121 R122 TP54 TP55 TP56 TP57 TP58 TP59 TP60 TP61 TP62 TP63 U3 U8 U18 U34 U35 U36
pad class "Pad Class Clearance 0.04": T1-1 T1-2 T1-3 T1-4 T1-5 T1-6 T2-1 T2-2 T2-3 T2-4 T2-5 T2-6
pad class "Pad Class Clearance 0.05": D1-1 D1-2 D1-Un1 D1-Un2 D3-1 D3-2 D3-Un1 D3-Un2 D9-1 D9-2 D9-Un1 D9-Un2 D10-1 D10-2 D10-Un1 D10-Un2 D11-1 D11-2 D11-Un1 D11-Un2 D13-1 D13-2 D13-Un1 D13-Un2 D14-1 D14-2 D14-Un1 D14-Un2 D15-1 D15-2 D15-Un1 D15-Un2 D16-1 D16-2 D16-Un1 D16-Un2 D17-1 D17-2 D17-Un1 D17-Un2 D18-1 D18-2 D18-Un1 D18-Un2

## Components (designator, comment, footprint, x,y, rotation, side; value= is the part's Value field where it differs from the comment)
C1 "1 uF" C_0201_0603Metric 83.4,49.82 r270 top
C2 "1 uF" C_0201_0603Metric 73.95,27.02 r90 top
C3 "1 uF" C_0201_0603Metric 84.6,49.82 r270 top
C4 "3.3 nF" C_0201_0603Metric 78.35,40.77 r180 top
C5 "1 uF" C_0201_0603Metric 84.2,57.42 r90 top
C6 "3.3 nF" C_0201_0603Metric 83.35,27.52 r90 top
C7 "1 uF" C_0201_0603Metric 94.65,54.02 r90 top
C8 "1 uF" C_0201_0603Metric 89.75,46.47 r0 top
C9 "3.3 nF" C_0201_0603Metric 86.85,46.47 r0 top
C10 "1 uF" C_0201_0603Metric 89.8,43.02 r0 top
C11 "3.3 nF" C_0201_0603Metric 89.8,44.12 r180 top
C12 "330 pF" C_0201_0603Metric 81.7,57.12 r180 top
C13 "330 pF" C_0201_0603Metric 80.6,58.22 r90 top
C14 "8.2 pF" C_0201_0603Metric 83.1,57.12 r0 top
C15 "180 pF" C_0201_0603Metric 82.8,58.22 r90 top
C16 "3.3 nF" C_0201_0603Metric 94.65,51.22 r90 top
C17 "1 uF" C_0201_0603Metric 93.7,44.37 r270 top
C18 "3.3 nF" C_0201_0603Metric 95.8,31.02 r90 top
C19 "3.3 nF" C_0201_0603Metric 88.4,35.02 r180 top
C20 "3.3 nF" C_0201_0603Metric 95.9,44.37 r90 top
C21 "1 uF" C_0201_0603Metric 94.8,31.02 r270 top
C22 "1 uF" C_0402_1005Metric 71.3,43.92 r0 top
C23 "1 uF" C_0402_1005Metric 73.9,46.12 r270 top
C24 "1 uF" C_0201_0603Metric 113.85,30.77 r0 top
C25 "1 uF" C_0201_0603Metric 87.7,48.62 r0 top
C26 "1 uF" C_0201_0603Metric 85.3,27.72 r90 top
C27 "1 uF" C_0201_0603Metric 93.3,27.72 r90 top
C28 "1 uF" C_0201_0603Metric 87.7,47.72 r0 top
C29 "3.3 nF" C_0201_0603Metric 88.4,36.07 r180 top
C30 "1 uF" C_0201_0603Metric 89.3,27.72 r90 top
C31 "1 uF" C_0201_0603Metric 88.4,33.97 r0 top
C32 "1 uF" C_0402_1005Metric 163.1,27.12 r0 top
C33 "1 uF" C_0402_1005Metric 158.1,26.42 r270 top
C34 "33 pF" C_0201_0603Metric 89.7,57.82 r90 top
C35 "33 pF" C_0201_0603Metric 88.8,57.82 r90 top
C36 "33 pF" C_0201_0603Metric 87.9,57.82 r90 top
C37 "33 pF" C_0201_0603Metric 87,57.42 r90 top
C39 "1 uF" C_0402_1005Metric 132.9,27.67 r0 top
C40 "1 uF" C_0402_1005Metric 135.1,37.02 r270 top
C41 "1 uF" C_0201_0603Metric 90.15,48.97 r180 top
C42 "1 uF" C_0201_0603Metric 91.45,57.32 r90 top
C43 "1 uF" C_0402_1005Metric 135.1,35.02 r90 top
C44 "100 pF" C_0201_0603Metric 106.45,30.17 r90 top
C45 "2.2 nF" C_0201_0603Metric 108.2,29.82 r180 top
C46 "1 uF" C_0201_0603Metric 93.65,52.97 r90 top
C47 "68 pF" C_0201_0603Metric 109.15,36.02 r180 top
C48 "1 uF" C_0201_0603Metric 109.15,33.17 r0 top
C49 "1 uF" C_0201_0603Metric 92.35,54.42 r180 top
C50 "1 uF" C_0201_0603Metric 83.1,32.57 r0 top
C51 "0.7 pF" C_0201_0603Metric 89.2,41.02 r90 top
C52 "1 uF" C_0201_0603Metric 79.35,31.97 r0 top
C53 "1 uF" C_0201_0603Metric 77.25,27.32 r180 top
C54 "1.8 pF" C_0201_0603Metric 90.95,39.97 r0 top
C55 "3.3 nF" C_0201_0603Metric 81.25,33.77 r0 top
C56 "1.8 pF" C_0201_0603Metric 89.9,38.22 r270 top
C57 "3.3 nF" C_0201_0603Metric 81.25,34.82 r0 top
C58 "1 uF" C_0201_0603Metric 76.45,32.92 r0 top
C59 "1 uF" C_0201_0603Metric 81.7,37.82 r180 top
C60 "1 uF" C_0201_0603Metric 81.25,35.87 r180 top
C61 "0.7 pF" C_0201_0603Metric 87.8,38.92 r90 top
C62 "1 uF" C_0201_0603Metric 75.6,37.82 r270 top
C63 "3.3 nF" C_0201_0603Metric 77.45,35.02 r180 top
C64 "1 uF" C_0402_1005Metric 71.45,34.92 r180 top
C65 "3.3 nF" C_0201_0603Metric 77.45,36.07 r180 top
C66 "1 uF" C_0201_0603Metric 77.45,33.97 r0 top
C67 "33 pF" C_0201_0603Metric 80.7,53.67 r90 top
C68 "1 uF" C_0201_0603Metric 74.65,34.92 r180 top
C69 "1 uF" C_0201_0603Metric 73.65,33.57 r270 top
C70 "100 pF" C_0201_0603Metric 81.05,55.07 r90 top
C71 "1 uF" C_0201_0603Metric 105,50.82 r180 top
C72 "1 uF" C_0201_0603Metric 115.4,37.32 r0 top
C73 "1 uF" C_0201_0603Metric 108.1,50.82 r180 top
C74 "180 pF" C_0201_0603Metric 109.8,46.82 r180 top
C75 "1 uF" C_0201_0603Metric 110.1,50.82 r0 top
C76 "180 pF" C_0201_0603Metric 109.8,42.32 r180 top
C77 "1 uF" C_0201_0603Metric 106.4,59.82 r0 top
C78 "1 uF" C_0201_0603Metric 80.6,29.67 r180 top
C79 "1 uF" C_0201_0603Metric 102.9,57.52 r90 top
C80 "1 uF" C_0402_1005Metric 66.4,77.92 r270 top
C81 "1 uF" C_0402_1005Metric 63.3,59.02 r180 top
C82 "1 uF" C_0201_0603Metric 102.9,55.37 r90 top
C83 "1 uF" C_0201_0603Metric 102.6,53.72 r180 top
C84 "1 uF" C_0201_0603Metric 99.8,37.52 r270 top
C85 "1 uF" C_0201_0603Metric 99.45,34.92 r180 top
C86 "1 uF" C_0201_0603Metric 101.55,30.17 r270 top
C87 "1 uF" C_0201_0603Metric 103.55,30.17 r270 top
C88 "1 uF" C_0201_0603Metric 105.05,30.17 r270 top
C89 "1 uF" C_0201_0603Metric 108.8,32.12 r90 top
C90 "1 uF" C_0201_0603Metric 108.8,34.87 r90 top
C91 "1.6 pF" C_0201_0603Metric 85.35,41.72 r180 top
C92 "1 uF" C_0201_0603Metric 105.95,39.87 r90 top
C93 "1 uF" C_0201_0603Metric 105.15,39.87 r90 top
C94 "1 uF" C_0201_0603Metric 102.15,39.52 r180 top
C95 "1 uF" C_0201_0603Metric 75.15,30.42 r180 top
C96 "1.6 pF" C_0201_0603Metric 86.05,39.62 r0 top
C97 "1 uF" C_0201_0603Metric 102.6,52.21 r180 top
C98 "1 uF" C_0201_0603Metric 102.9,51.12 r270 top
C99 "22 pF" C_0201_0603Metric 99.45,36.32 r180 top
C100 "1 uF" C_0201_0603Metric 103.9,50.52 r270 top
C101 "0.7 pF" C_0201_0603Metric 83.6,41.37 r270 top
C102 "22 pF" C_0201_0603Metric 99.45,35.62 r180 top
C103 "0.7 pF" C_0201_0603Metric 83.95,39.62 r0 top
C104 "4.3 pF" C_0201_0603Metric 99.45,33.82 r180 top
C105 "10 uF" C_0805_2012Metric 84,67.12 r0 top
C106 "1 uF" C_0201_0603Metric 109.15,36.72 r0 top
C107 "180 pF" C_0201_0603Metric 115.4,42.32 r180 top
C108 "180 pF" C_0201_0603Metric 115.4,46.82 r180 top
C109 "33 pF" C_0201_0603Metric 86.1,57.42 r90 top
C110 "1 uF" C_0402_1005Metric 63.3,54.52 r180 top
C111 "4.3 pF" C_0201_0603Metric 99.45,33.12 r180 top
C112 "100 pF" C_0201_0603Metric 71,32.92 r180 top
C113 "1 uF" C_0402_1005Metric 122.6,30.12 r270 top
C114 "0.3 pF" C_0201_0603Metric 90.35,53.12 r90 top
C115 "22 pF" C_0201_0603Metric 111,34.07 r180 top
C116 "47 pF" C_0201_0603Metric 111,34.77 r0 top
C117 "10 uF" C_0805_2012Metric 134.2,69.92 r270 top
C118 "18 pF" C_0402_1005Metric 164.2,44.62 r270 top
C119 "1 uF" C_0402_1005Metric 127.4,35.32 r0 top
C120 "1 uF" C_0402_1005Metric 128.8,33.82 r90 top
C121 "1 uF" C_0402_1005Metric 122.15,31.97 r180 top
C122 "1 uF" C_0402_1005Metric 124.6,35.32 r180 top
C123 "1 uF" C_0201_0603Metric 111.9,54.82 r270 top
C124 "1 uF" C_0402_1005Metric 63.3,49.92 r180 top
C125 "33 pF" C_0201_0603Metric 162.4,82.92 r0 top
C126 "10 uF" C_0805_2012Metric 163.2,85.72 r270 top
C127 "10 uF" C_0805_2012Metric 161.2,85.72 r270 top
C128 "1 uF" C_0402_1005Metric 145.6,53.32 r0 top
C129 "1 uF" C_0402_1005Metric 144.5,48.02 r90 top
C130 "1 uF" C_0402_1005Metric 144.5,43.12 r90 top
C131 "1 uF" C_0402_1005Metric 159.5,47.62 r90 top
C132 "1 uF" C_0402_1005Metric 159.5,51.32 r90 top
C133 "1 uF" C_0402_1005Metric 151.7,53.32 r0 top
C134 "1 uF" C_0402_1005Metric 145.9,38.32 r0 top
C135 "1 uF" C_0402_1005Metric 151.8,38.32 r0 top
C136 "1 uF" C_0402_1005Metric 160.4,45.02 r0 top
C137 "1 uF" C_0402_1005Metric 158.1,38.32 r0 top
C138 "1 uF" C_0402_1005Metric 159.5,42.82 r90 top
C139 "1 uF" C_0201_0603Metric 73.9,40.62 r90 top
C140 "1 uF" C_0402_1005Metric 102,64.62 r0 top
C141 "1 uF" C_0201_0603Metric 113.3,48.72 r0 top
C142 "1 uF" C_0201_0603Metric 111.75,41.97 r90 top
C143 "22 uF" C_0805_2012Metric 165.7,80.52 r180 top
C144 "1 uF" C_0402_1005Metric 161.1,35.52 r0 top
C145 "10 uF" C_0805_2012Metric 169.8,85.72 r90 top
C146 "10 uF" C_0805_2012Metric 171.8,85.72 r90 top
C147 "22 uF" C_0805_2012Metric 165.7,82.52 r180 top
C148 "1 uF" C_0201_0603Metric 133.92,67.25 r90 top
C149 "1 uF" C_0201_0603Metric 140.23,64.27 r0 top
C150 "1 uF" C_0201_0603Metric 132.11,57.94 r180 top
C151 "330 pF" C_0201_0603Metric 164,59.97 r180 top
C152 "330 pF" C_0201_0603Metric 165.4,59.97 r0 top
C153 "100 nF" C_0402_1005Metric 80.6,68.17 r0 top
C154 "10 uF" C_0805_2012Metric 84,65.12 r0 top
C155 "100 nF" C_0402_1005Metric 124,29.12 r180 top
C156 "1 uF" C_0201_0603Metric 107.7,48.72 r0 top
C157 "18 pF" C_0402_1005Metric 159.7,54.52 r270 top
C158 "18 pF" C_0402_1005Metric 154.5,54.52 r90 top
C159 "1 uF" C_0201_0603Metric 106.15,41.97 r90 top
C160 "1 uF" C_0201_0603Metric 76.3,42.02 r90 top
C161 "1 uF" C_0201_0603Metric 79.55,37.57 r180 top
C162 "1 uF" C_0402_1005Metric 63.3,63.72 r180 top
C163 "10 uF" C_0805_2012Metric 76.1,65.92 r270 top
C164 "18 pF" C_0402_1005Metric 164.2,46.82 r90 top
C165 "10 uF" C_0805_2012Metric 147.6,60.12 r0 top
C166 "10 uF" C_0805_2012Metric 128.7,45.12 r90 top
C167 "10 uF" C_0805_2012Metric 128.7,40.12 r270 top
C168 "1 uF" C_0402_1005Metric 121,29.12 r0 top
C169 "10 uF" C_0805_2012Metric 98.5,65.52 r0 top
C170 "10 uF" C_0805_2012Metric 93.5,65.52 r180 top
C171 "1 uF" C_0402_1005Metric 69.5,26.62 r270 top
C172 "10 uF" C_0805_2012Metric 152.1,70.52 r0 top
C173 "1 uF" C_0402_1005Metric 139.5,70.82 r270 top
C174 "1 uF" C_0201_0603Metric 130.1,60.52 r270 top
C175 "10 uF" C_0805_2012Metric 141.7,67.22 r180 top
C176 "1 uF" C_0201_0603Metric 136.4,67.25 r90 top
C177 "1 uF" C_0201_0603Metric 139.9,65.42 r90 top
C178 "1 uF" C_0201_0603Metric 135.49,67.25 r90 top
C179 "1 uF" C_0201_0603Metric 134.71,57.59 r270 top
C180 "100 nF" C_0402_1005Metric 150.3,63.12 r90 top
C181 "10 uF" C_0805_2012Metric 145.6,67.72 r180 top
C182 "10 uF" C_0805_2012Metric 145.6,65.72 r180 top
C183 "1 uF" C_0201_0603Metric 141.1,59.52 r270 top
C184 "10 uF" C_0805_2012Metric 147.1,70.52 r180 top
C185 "1 uF" C_0201_0603Metric 129.7,66.27 r180 top
C186 "10 uF" C_0805_2012Metric 116.4,54.22 r270 top
C187 "1 uF" C_0201_0603Metric 111.3,60.82 r180 top
C188 "0.3 pF" C_0201_0603Metric 75.8,48.92 r180 top
C189 "1 uF" C_0201_0603Metric 82.1,44.12 r180 top
C190 "1 uF" C_0201_0603Metric 73.05,52.77 r90 top
C191 "1 uF" C_0201_0603Metric 74.4,49.62 r180 top
C192 "1 uF" C_0201_0603Metric 75.45,51.37 r90 top
C193 "1 uF" C_0201_0603Metric 77.75,52.47 r270 top
C194 "1 uF" C_0201_0603Metric 77.9,53.82 r0 top
C195 "1 uF" C_0201_0603Metric 76.85,55.57 r90 top
C196 "1 uF" C_0201_0603Metric 139.3,67.07 r0 top
C197 "10 uF" C_0805_2012Metric 128.3,61.42 r90 top
C198 "0.7 pF" C_0201_0603Metric 88.25,52.42 r270 top
C199 "1 uF" C_0402_1005Metric 127.2,28.62 r90 top
C200 "10 uF" C_0805_2012Metric 71.6,38.62 r180 top
C201 "10 uF" C_0805_2012Metric 97.9,41.32 r90 top
C202 "1 uF" C_0201_0603Metric 90.2,54.87 r180 top
C203 "1 uF" C_0201_0603Metric 90.2,51.37 r0 top
C204 "10 uF" C_0805_2012Metric 96.9,58.82 r0 top
C205 "1 uF" C_0201_0603Metric 139.55,57.92 r0 top
C206 "1 uF" C_0201_0603Metric 80.8,26.17 r0 top
C207 "1 uF" C_0201_0603Metric 84.8,31.77 r0 top
C208 "1 uF" C_0201_0603Metric 86.45,30.27 r270 top
C209 "0.3 pF" C_0201_0603Metric 83.6,33.37 r0 top
C210 "1 uF" C_0201_0603Metric 78.65,28.72 r0 top
C211 "1 uF" C_0201_0603Metric 75.45,56.97 r270 top
C212 "1 uF" C_0201_0603Metric 97.7,27.07 r270 top
D1 "TVS" TSSLP-2-1 66.5,34.62 r270 top
D2 "LED" LED_Single_Xinglight_XL-3210_Horizontal 61.27,60.698 r90 top
D3 "TVS" TSLP-2-19 172.9,30.62 r270 top
D4 "LED" LED_Dual_Xinglight_XL-3210_Horizontal 61.27,56.126 r90 top
D5 "LED" LED_Single_Xinglight_XL-3210_Horizontal 61.27,51.554 r90 top
D6 "LED" LED_Dual_Xinglight_XL-3210_Horizontal 61.27,46.982 r90 top
D7 "LED" LED_Dual_Xinglight_XL-3210_Horizontal 61.27,77.92 r90 top
D8 "LED" LED_Dual_Xinglight_XL-3210_Horizontal 61.27,65.27 r90 top
D9 "TVS" TSLP-2-19 175.5,44.32 r0 top
D10 "Schottky" TSLP-2-19 69.5,28.22 r270 top
D11 "6.2 V" TSLP-2-19 168.55,77.42 r0 top
D12 "D" D_SOD-123FL 169.7,79.22 r0 top
D13 "0" TSLP-2-19 164.6,78.82 r180 top
D14 "PIN" TSLP-2-19 72.85,34.57 r270 top
D15 "Schottky" TSSLP-2-1 73.65,34.72 r90 top
D16 "5.6 V" TSLP-2-19 177.8,82.02 r180 top
D17 "5.6 V" TSLP-2-19 160.6,76.62 r0 top
D18 "TVS" TSLP-2-19 170.5,75.02 r90 top
FB1 "Ferrite" L_0603_1608Metric 168.2,81.92 r270 top
FB2 "Ferrite" L_0603_1608Metric 128.7,42.62 r0 top
FB3 "Ferrite" L_0603_1608Metric 81.5,66.12 r90 top
FB4 "Ferrite" L_0603_1608Metric 148.2,66.22 r90 top
FB5 "Ferrite" L_0603_1608Metric 96,65.52 r270 top
FB6 "Ferrite" L_0603_1608Metric 136,69.47 r90 top
FB7 "Ferrite" L_0603_1608Metric 149.6,70.52 r270 top
FB8 "Ferrite" L_0603_1608Metric 141.8,65.42 r180 top
FL1 "CommonModeChoke" L_CommonModeChoke_Murata_DLM0NS 167.6,71.82 r0 top
FL2 "BPF" Filter_Pulse_BPF1608LM09R5000A 91.9,32.57 r180 top
FL3 "BPF" Filter_Pulse_BPF1608LM09R5000A 94.8,37.22 r90 top
H1 "MountingHole_Pad" MountingHole_3.2mm_M3_Pad_Via 64,91.82 r0 top
H2 "MountingHole_Pad" MountingHole_3.2mm_M3_Pad_Via 64,24.82 r0 top
H3 "MountingHole_Pad" MountingHole_3.2mm_M3_Pad_Via 176,24.82 r0 top
H4 "MountingHole_Pad" MountingHole_3.2mm_M3_Pad_Via 176,91.82 r0 top
H5 "MountingHole_Pad" MountingHole_2.2mm_M2_Pad_Via 64,42.32 r0 top
H6 "MountingHole_Pad" MountingHole_2.2mm_M2_Pad_Via 169,23.82 r0 top
H7 "MountingHole_Pad" MountingHole_2.2mm_M2_Pad_Via 177.5,63.82 r0 top
H8 "MountingHole_Pad" MountingHole_2.2mm_M2_Pad_Via 71,68.82 r0 top
J1 "USB_C" USB_C_Receptacle_HRO_TYPE-C-31-M-12 177.35,71.82 r90 top
J3 "RF_SHIELD_FRAME" Laird_Technologies_BMI-S-230-F_50.8x38.1mm 93,43.82 r0 top
L1 "DNP" L_0201_0603Metric 86,50.12 r0 top
L2 "100 uH" L_TDK_MLZ2012_h1.25mm 89.55,56.07 r180 top
L3 "56 nH" L_0201_0603Metric 88.95,53.82 r270 top
L4 "100 uH" L_TDK_MLZ2012_h1.25mm 77.1,29.22 r90 top
L5 "100 uH" L_TDK_MLZ2012_h1.25mm 84.55,30.57 r180 top
L6 "5.6 nH" L_0201_0603Metric 88.25,53.82 r270 top
L7 "DNP" L_0201_0603Metric 98.4,35.97 r90 top
L8 "4.7 nH" L_0201_0603Metric 90.25,40.67 r180 top
L9 "10 nH" L_0201_0603Metric 98.4,33.47 r90 top
L10 "4.7 uH" L_Taiyo-Yuden_NR-40xx 163.1,90.12 r180 top
L11 "4.7 uH" L_Taiyo-Yuden_NR-40xx 170,90.12 r180 top
L12 "56 nH" L_0201_0603Metric 77,39.22 r270 top
L13 "2.2 uH" L_0603_1608Metric 69.45,34.07 r90 top
L14 "5.6 nH" L_0201_0603Metric 90.6,38.92 r90 top
L15 "4.7 nH" L_0201_0603Metric 88.85,38.57 r0 top
L16 "1.8 nH" L_0201_0603Metric 84.3,42.07 r90 top
L17 "1.8 nH" L_0201_0603Metric 85,39.27 r270 top
L18 "1.6 nH" L_0201_0603Metric 83.25,40.32 r180 top
L19 "47 uH" L_Taiyo-Yuden_A251818 69.9,30.92 r90 top
L21 "100 uH" L_TDK_MLZ2012_h1.25mm 116.25,44.22 r270 top
L22 "100 uH" L_TDK_MLZ2012_h1.25mm 114.55,44.22 r270 top
L23 "100 uH" L_TDK_MLZ2012_h1.25mm 110.65,44.22 r270 top
L24 "100 uH" L_TDK_MLZ2012_h1.25mm 108.95,44.22 r270 top
L26 "100 uH" L_TDK_MLZ2012_h1.25mm 75.1,41.17 r270 top
L27 "100 uH" L_TDK_MLZ2012_h1.25mm 74.25,51.52 r270 top
L28 "18 nH" L_0201_0603Metric 75.8,50.32 r0 top
L29 "100 uH" L_TDK_MLZ2012_h1.25mm 89.55,50.17 r180 top
L30 "56 nH" L_0201_0603Metric 88.95,52.42 r90 top
L31 "56 nH" L_0201_0603Metric 77.25,31.82 r0 top
L32 "56 nH" L_0201_0603Metric 82.3,30.37 r180 top
L33 "100 uH" L_TDK_MLZ2012_h1.25mm 78.05,55.72 r90 top
L34 "33 nH" L_0201_0603Metric 75.8,53.82 r180 top
P1 "SMA" SMA_MyAntenna_A-SMA-KE-16.5A_EdgeMount 178.5,32.82 r180 top
P2 "SMA" SMA_MyAntenna_A-SMA-KE-16.5A_EdgeMount 178.5,50.82 r180 top
P3 "SMA" SMA_MyAntenna_A-SMA-KE-16.5A_EdgeMount 61.5,34.82 r0 top
P20 "HEADER_2x11" PinSocket_2x11_P2.54mm_Vertical_Flipped 173.03,39.87 r180 top
P22 "HEADER_2x13" PinSocket_2x13_P2.54mm_Vertical_Flipped 167.95,32.25 r270 top
P26 "LPC_JTAG" PinHeader_2x05_P1.27mm_Vertical 160.55,69.445 r270 top
P28 "HEADER_2x11" PinSocket_2x11_P2.54mm_Vertical_Flipped 124.77,39.87 r180 top
Q1 "NMOS/PMOS" SOT-563 74.65,31.72 r0 top
Q3 "PMOS" SOT-23-3 79,65.62 r270 top
Q4 "PMOS" SOT-23-3 174.038,80.82 r180 top
Q5 "PMOS" SOT-23-3 160.763,78.82 r0 top
Q6 "PMOS" SOT-23-3 147.7,63.02 r0 top
Q7 "2NPN" SOT-363_SC-70-6 151.5,65.52 r180 top
Q9 "2PNP" SOT-363_SC-70-6 175.1,84.02 r180 top
Q10 "2NPN" SOT-363_SC-70-6 175.1,86.82 r180 top
R1 "470" R_0201_0603Metric 81.7,57.82 r0 top
R2 "470" R_0201_0603Metric 81.7,58.52 r180 top
R3 "22.6k" R_0201_0603Metric 83.5,58.22 r90 top
R4 "51k" R_0201_0603Metric 85.4,57.42 r270 top
R5 "10k" R_0402_1005Metric 90.55,57.87 r90 top
R6 "100" R_0201_0603Metric 142.5,36.82 r180 top
R7 "10k" R_0402_1005Metric 66.7,65.32 r270 top
R8 "0" R_0201_0603Metric 99.4,47.87 r270 top
R9 "0" R_0201_0603Metric 100.4,47.87 r270 top
R10 "0" R_0201_0603Metric 102.7,46.27 r270 top
R11 "22.6k" R_0201_0603Metric 76.1,68.17 r0 top
R12 "33" R_0201_0603Metric 126.2,37.22 r0 top
R13 "0" R_0201_0603Metric 103.7,46.27 r270 top
R14 "DNP" R_0201_0603Metric 103.7,43.96 r270 top
R15 "DNP" R_0201_0603Metric 102.7,43.96 r270 top
R16 "DNP" R_0201_0603Metric 100.4,45.56 r270 top
R17 "DNP" R_0201_0603Metric 99.4,45.56 r270 top
R18 "22.6k" R_0201_0603Metric 63.3,62.32 r0 top
R19 "33" R_0201_0603Metric 68.4,77.92 r90 top
R20 "180k" R_0402_1005Metric 72.75,30.22 r90 top
R21 "100" R_0201_0603Metric 142.8,60.92 r270 top
R22 "33k" R_0201_0603Metric 176.45,79.97 r270 top
R23 "33" R_0201_0603Metric 122.1,33.17 r0 top
R24 "1k" R_0201_0603Metric 112.45,31.47 r0 top
R25 "750" R_0201_0603Metric 108.2,30.52 r180 top
R26 "1.2k" R_0201_0603Metric 107.15,30.17 r90 top
R27 "1.8k" R_0402_1005Metric 137.85,35.67 r0 top
R28 "1.8k" R_0402_1005Metric 137.85,34.67 r0 top
R29 "100" R_0201_0603Metric 72.6,31.92 r270 top
R30 "33" R_0201_0603Metric 67.8,65.32 r90 top
R31 "33" R_0201_0603Metric 125,36.52 r0 top
R32 "33" R_0201_0603Metric 120.8,30.82 r0 top
R33 "10" R_0201_0603Metric 135.2,28.42 r270 top
R34 "33" R_0201_0603Metric 122.45,35.32 r0 top
R35 "1k" R_0201_0603Metric 71.55,31.87 r90 top
R36 "10k" R_0402_1005Metric 75.15,27.22 r270 top
R37 "10k" R_0402_1005Metric 161.5,54.42 r0 top
R38 "180k" R_0402_1005Metric 160.9,50.02 r180 top
R39 "37.4k" R_0402_1005Metric 160.9,49.02 r0 top
R40 "10k" R_0402_1005Metric 136.9,56.62 r270 top
R41 "33" R_0201_0603Metric 126.9,36.52 r180 top
R42 "220" R_0201_0603Metric 79,27.67 r90 top
R43 "220" R_0201_0603Metric 89.65,52.42 r90 top
R44 "10k" R_0402_1005Metric 141.5,61.12 r0 top
R45 "1.8k" R_0402_1005Metric 135.9,56.62 r270 top
R46 "180k" R_0402_1005Metric 162.2,81.02 r180 top
R47 "180k" R_0402_1005Metric 162.2,82.02 r0 top
R48 "10k" R_0402_1005Metric 165.4,42.94 r270 top
R49 "10k" R_0402_1005Metric 67.4,77.92 r90 top
R50 "10k" R_0402_1005Metric 63.3,79.12 r0 top
R51 "4.7k" R_0201_0603Metric 160.2,81.22 r90 top
R52 "10k" R_0402_1005Metric 170.2,81.32 r0 top
R53 "1.8k" R_0402_1005Metric 151.8,68.12 r270 top
R54 "4.7k" R_0201_0603Metric 166.3,89.02 r180 top
R55 "180k" R_0402_1005Metric 170.2,83.32 r180 top
R56 "820k" R_0402_1005Metric 170.2,82.32 r0 top
R57 "33k" R_0201_0603Metric 160.9,81.22 r90 top
R58 "820k" R_0402_1005Metric 176.6,81.62 r270 top
R59 "10k" R_0402_1005Metric 155.6,37.32 r180 top
R60 "5.1k" R_0402_1005Metric 78.75,68.17 r180 top
R61 "22.6k" R_0201_0603Metric 145.3,62.02 r90 top
R62 "10k" R_0402_1005Metric 166.5,76.62 r0 top
R63 "10k" R_0402_1005Metric 156.1,65.82 r0 top
R64 "10k" R_0402_1005Metric 149.4,53.82 r90 top
R65 "18k" R_0402_1005Metric 166.51,75.62 r180 top
R66 "10k" R_0402_1005Metric 156.1,64.82 r0 top
R67 "10k" R_0402_1005Metric 145.6,54.32 r180 top
R68 "10k" R_0402_1005Metric 145.6,55.32 r180 top
R69 "12k" R_0201_0603Metric 151.9,54.22 r180 top
R70 "820k" R_0402_1005Metric 159.2,75.12 r90 top
R71 "5.1k" R_0402_1005Metric 149.4,65.72 r90 top
R72 "470" R_0201_0603Metric 63.3,56.52 r0 top
R73 "3k" R_0402_1005Metric 63.3,53.12 r0 top
R74 "4.7k" R_0201_0603Metric 63.3,48.52 r0 top
R75 "10k" R_0402_1005Metric 63.3,78.12 r0 top
R76 "4.7k" R_0201_0603Metric 63.3,65.72 r0 top
R77 "2.2k" R_0201_0603Metric 164.7,75.42 r270 top
R78 "2.2k" R_0201_0603Metric 161.75,74.42 r270 top
R79 "5.1k" R_0402_1005Metric 164.2,76.62 r180 top
R80 "5.1k" R_0402_1005Metric 162.3,75.62 r0 top
R81 "33k" R_0201_0603Metric 177.45,83.97 r0 top
R82 "18k" R_0402_1005Metric 161.5,53.42 r180 top
R83 "33k" R_0201_0603Metric 177.45,86.82 r0 top
R84 "33" R_0201_0603Metric 122.1,33.97 r0 top
R85 "10k" R_0402_1005Metric 129.3,30.57 r180 top
R86 "33k" R_0201_0603Metric 177.45,84.67 r180 top
R87 "33k" R_0201_0603Metric 177.45,87.52 r180 top
R88 "18.7k" R_0402_1005Metric 177.7,83.12 r0 top
R89 "18.7k" R_0402_1005Metric 177.6,80.52 r270 top
R90 "18.7k" R_0402_1005Metric 160.3,75.12 r90 top
R91 "18.7k" R_0402_1005Metric 162.3,76.62 r0 top
R92 "4.7k" R_0201_0603Metric 112.45,30.77 r180 top
R93 "10k" R_0402_1005Metric 151.8,37.32 r180 top
R94 "1k" R_0201_0603Metric 110.1,27.22 r90 top
R95 "4.7k" R_0201_0603Metric 110.8,27.22 r270 top
R96 "1k" R_0201_0603Metric 116.1,29.72 r270 top
R97 "4.7k" R_0201_0603Metric 115.4,29.72 r90 top
R98 "1k" R_0201_0603Metric 89.9,26.22 r0 top
R99 "4.7k" R_0201_0603Metric 91.3,26.22 r0 top
R100 "10k" R_0402_1005Metric 157.6,24.92 r180 top
R101 "100k" R_0402_1005Metric 163.1,25.82 r0 top
R102 "330" R_0201_0603Metric 110.5,46.12 r0 top
R103 "4.7k" R_0201_0603Metric 164.35,58.92 r90 top
R104 "10k" R_0402_1005Metric 125.4,28.62 r90 top
R105 "10k" R_0402_1005Metric 129.3,31.52 r180 top
R106 "4.7k" R_0201_0603Metric 165.05,58.92 r90 top
R107 "4.7k" R_0201_0603Metric 161.5,55.42 r0 top
R108 "33" R_0201_0603Metric 135.2,29.82 r90 top
R109 "4.7k" R_0201_0603Metric 99.6,31.62 r90 top
R110 "330" R_0201_0603Metric 116.1,46.12 r0 top
R111 "330" R_0201_0603Metric 114.7,46.12 r180 top
R112 "330" R_0201_0603Metric 109.1,46.12 r180 top
R113 "10k" R_0402_1005Metric 106.25,43.62 r90 top
R114 "1k" R_0201_0603Metric 80.75,31.97 r180 top
R115 "470" R_0201_0603Metric 79.2,29.67 r0 top
R116 "470" R_0201_0603Metric 78.3,27.67 r270 top
R117 "470" R_0201_0603Metric 83.7,29.37 r0 top
R118 "DNP" R_0201_0603Metric 103.2,45.12 r180 top
R119 "DNP" R_0201_0603Metric 99.9,46.72 r180 top
R120 "10k" R_0402_1005Metric 80.45,56.27 r0 top
R121 "12k" R_0201_0603Metric 101.55,52.32 r90 top
R122 "4.7k" R_0201_0603Metric 102.6,53.02 r180 top
R123 "10" R_0201_0603Metric 75.45,55.57 r90 top
R124 "220" R_0201_0603Metric 89.65,53.82 r270 top
R125 "12k" R_0201_0603Metric 63.3,57.72 r0 top
R126 "4.7k" R_0201_0603Metric 71.55,30.22 r90 top
R127 "100" R_0201_0603Metric 139.3,44.62 r0 top
R128 "220" R_0201_0603Metric 76.3,40.62 r90 top
R129 "1k" R_0201_0603Metric 76.3,39.22 r90 top
R130 "220" R_0201_0603Metric 73.05,49.97 r270 top
R131 "220" R_0201_0603Metric 73.9,42.02 r270 top
R132 "470" R_0201_0603Metric 73.05,51.37 r90 top
R133 "1k" R_0201_0603Metric 75.8,49.62 r180 top
R134 "180" R_0201_0603Metric 75.45,52.77 r270 top
R135 "12k" R_0201_0603Metric 77.75,51.07 r90 top
R136 "220" R_0201_0603Metric 76.85,56.97 r270 top
R137 "470" R_0201_0603Metric 76.85,54.17 r270 top
R138 "1k" R_0201_0603Metric 75.8,54.52 r0 top
R139 "33" R_0201_0603Metric 129.75,35.42 r270 top
R140 "100" R_0201_0603Metric 144.55,51.42 r90 top
R141 "100" R_0201_0603Metric 139.3,43.92 r180 top
R142 "33" R_0201_0603Metric 88.8,51.37 r180 top
R143 "100" R_0201_0603Metric 91.45,51.02 r90 top
R144 "1k" R_0201_0603Metric 88.8,54.87 r180 top
R145 "100" R_0201_0603Metric 141.1,58.12 r90 top
R146 "220" R_0201_0603Metric 86.2,31.77 r180 top
R147 "220" R_0201_0603Metric 91.45,55.92 r90 top
R148 "100" R_0201_0603Metric 112.4,34.77 r180 top
R149 "0" R_0201_0603Metric 112.4,34.07 r0 top
R150 "0" R_0201_0603Metric 80,53.67 r90 top
R151 "1k" R_0201_0603Metric 80,54.72 r180 top
R152 "3" R_0201_0603Metric 83.1,31.87 r180 top
R153 "1k" R_0201_0603Metric 77.25,31.12 r180 top
R154 "1k" R_0201_0603Metric 82.3,31.07 r0 top
R155 "10" R_0201_0603Metric 76.85,49.27 r270 top
R156 "330" R_0201_0603Metric 163.3,58.57 r180 top
R157 "330" R_0201_0603Metric 166.1,58.57 r0 top
RN1 "100" R_Array_Convex_4x0402 138.1,68.62 r90 top
RN2 "100" R_Array_Convex_4x0402 131.95,69.62 r90 top
RN3 "100" R_Array_Convex_4x0402 130.45,67.62 r90 top
RN4 "100" R_Array_Convex_4x0402 112.8,59.32 r270 top
RN5 "100" R_Array_Convex_4x0402 114.7,56.92 r270 top
RN6 "100" R_Array_Convex_4x0402 134.1,55.82 r270 top
RN7 "100" R_Array_Convex_4x0402 138.9,56.42 r270 top
RN8 "100" R_Array_Convex_4x0402 142,63.32 r0 top
SW1 "SWITCH" SW_Tactile_SPST_Angled_PTS645Vx58-2LFS 62.7,69.17 r90 top
SW2 "SWITCH" SW_Tactile_SPST_Angled_PTS645Vx58-2LFS 62.7,82.17 r90 top
T1 "RF_BALUN" Anaren_0805_2012Metric-6 86,48.42 r180 top
T2 "RF_BALUN" Anaren_0805_2012Metric-6 92,53.12 r270 top
T3 "IF_BALUN" Balun_TDK_TFSZ06052460-3310A2X 97.65,35.97 r0 top
T4 "IF_BALUN" Balun_TDK_TFSZ06052460-3310A2X 97.65,33.47 r0 top
TP1 "TestPoint" TestPoint_Pad_D1.0mm 142.6,71.22 r0 bottom
TP2 "TestPoint" TestPoint_Pad_D1.0mm 145.2,65.72 r0 bottom
TP3 "TestPoint" TestPoint_Pad_D1.0mm 75.6,46.42 r0 bottom
TP4 "TestPoint" TestPoint_Pad_D1.0mm 83.7,63.02 r0 bottom
TP5 "TestPoint" TestPoint_Pad_D1.0mm 148.5,50.02 r0 bottom
TP6 "TestPoint" TestPoint_Loop_D1.80mm_Drill1.0mm_Beaded 128.9,55.32 r0 top
TP7 "TestPoint" TestPoint_Pad_D1.0mm 64.2,78.72 r0 bottom
TP8 "TestPoint" TestPoint_Pad_D1.0mm 62.8,76.22 r0 bottom
TP9 "TestPoint" TestPoint_Pad_D1.0mm 64.2,65.22 r0 bottom
TP10 "TestPoint" TestPoint_Pad_D1.0mm 64.2,61.42 r0 bottom
TP11 "TestPoint" TestPoint_Pad_D1.0mm 64.2,58.42 r0 bottom
TP12 "TestPoint" TestPoint_Pad_D1.0mm 62.8,56.02 r0 bottom
TP13 "TestPoint" TestPoint_Pad_D1.0mm 64.2,52.42 r0 bottom
TP14 "TestPoint" TestPoint_Pad_D1.0mm 64.2,47.82 r0 bottom
TP15 "TestPoint" TestPoint_Pad_D1.0mm 94.8,64.52 r0 bottom
TP16 "TestPoint" TestPoint_Pad_D1.0mm 130.6,40.42 r0 bottom
TP17 "TestPoint" TestPoint_Pad_D1.0mm 161.9,26.52 r0 bottom
TP18 "TestPoint" TestPoint_Pad_D1.0mm 162.2,86.92 r0 bottom
TP19 "TestPoint" TestPoint_Pad_D1.0mm 170.8,86.92 r0 bottom
TP20 "TestPoint" TestPoint_Pad_D1.0mm 175.2,80.02 r0 bottom
TP21 "TestPoint" TestPoint_Pad_D1.0mm 160.7,78.62 r0 bottom
TP22 "TestPoint" TestPoint_Pad_D1.0mm 148.3,71.52 r0 bottom
TP23 "TestPoint" TestPoint_Pad_D1.0mm 166.5,90.22 r0 bottom
TP24 "TestPoint" TestPoint_Pad_D1.0mm 147.2,52.62 r0 bottom
TP25 "TestPoint" TestPoint_Pad_D1.0mm 152.8,47.32 r0 bottom
TP26 "TestPoint" TestPoint_Pad_D1.0mm 150.9,58.22 r0 bottom
TP27 "TestPoint" TestPoint_Pad_D1.0mm 158,66.82 r0 bottom
TP28 "TestPoint" TestPoint_Pad_D1.0mm 150.8,61.52 r0 bottom
TP29 "TestPoint" TestPoint_Pad_D1.0mm 131.8,66.02 r0 bottom
TP30 "TestPoint" TestPoint_Pad_D1.0mm 64.5,84.02 r0 bottom
TP31 "TestPoint" TestPoint_Pad_D1.0mm 64.5,71.02 r0 bottom
TP32 "TestPoint" TestPoint_Pad_D1.0mm 144.1,40.72 r0 bottom
TP33 "TestPoint" TestPoint_Pad_D1.0mm 114.3,33.42 r0 bottom
TP34 "TestPoint" TestPoint_Pad_D1.0mm 78.5,55.32 r0 bottom
TP35 "TestPoint" TestPoint_Pad_D1.0mm 95.45,44.62 r0 bottom
TP36 "TestPoint" TestPoint_Pad_D1.0mm 152.4,50.72 r0 bottom
TP37 "TestPoint" TestPoint_Pad_D1.0mm 96.2,27.22 r0 bottom
TP38 "TestPoint" TestPoint_Pad_D1.0mm 90.9,43.02 r0 bottom
TP39 "TestPoint" TestPoint_Pad_D1.0mm 95.4,31.32 r0 bottom
TP40 "TestPoint" TestPoint_Pad_D1.0mm 86.8,35.12 r0 bottom
TP41 "TestPoint" TestPoint_Pad_D1.0mm 76.5,36.32 r0 bottom
TP42 "TestPoint" TestPoint_Pad_D1.0mm 78.05,42.32 r0 bottom
TP43 "TestPoint" TestPoint_Pad_D1.0mm 142.4,26.32 r0 bottom
TP44 "TestPoint" TestPoint_Pad_D1.0mm 117.1,27.02 r0 bottom
TP45 "TestPoint" TestPoint_Pad_D1.0mm 88.2,23.02 r0 bottom
TP46 "TestPoint" TestPoint_Pad_D1.0mm 115.6,29.72 r0 bottom
TP47 "TestPoint" TestPoint_Pad_D1.0mm 69.45,28.17 r0 bottom
TP48 "TestPoint" TestPoint_Pad_D1.0mm 146.3,57.42 r0 bottom
TP49 "TestPoint" TestPoint_Pad_D1.0mm 140.8,62.42 r0 bottom
TP50 "TestPoint" TestPoint_Pad_D1.0mm 144.4,55.52 r0 bottom
TP51 "TestPoint" TestPoint_Pad_D1.0mm 104.7,64.34 r0 bottom
TP52 "TestPoint" TestPoint_Pad_D1.0mm 98.2,30.22 r0 bottom
TP53 "TestPoint" TestPoint_Pad_D1.0mm 140.4,56.02 r0 bottom
TP54 "TestPoint" TestPoint_Pad_D1.0mm 112.4,41.62 r0 bottom
TP55 "TestPoint" TestPoint_Pad_D1.0mm 105.8,48.62 r0 bottom
TP56 "TestPoint" TestPoint_Pad_D1.0mm 100.8,47.62 r0 bottom
TP57 "TestPoint" TestPoint_Pad_D1.0mm 99,45.82 r0 bottom
TP58 "TestPoint" TestPoint_Pad_D1.0mm 102.3,44.22 r0 bottom
TP59 "TestPoint" TestPoint_Pad_D1.0mm 104.1,46.02 r0 bottom
TP60 "TestPoint" TestPoint_Pad_D1.0mm 111.2,38.12 r0 bottom
TP61 "TestPoint" TestPoint_Pad_D1.0mm 113.8,38.12 r0 bottom
TP62 "TestPoint" TestPoint_Pad_D1.0mm 107.3,41.42 r0 bottom
TP63 "TestPoint" TestPoint_Pad_D1.0mm 108.6,39.12 r0 bottom
TP64 "TestPoint" TestPoint_Pad_D1.0mm 166.2,36.02 r0 bottom
TP65 "TestPoint" TestPoint_Pad_D1.0mm 131.5,59.52 r0 bottom
TP66 "TestPoint" TestPoint_Pad_D1.0mm 81,48.32 r0 bottom
U1 "MXD8546F" QFN-12-1EP_2x2mm_P0.5mm_EP1x1mm 87.5,43.62 r180 top
U2 "MXD8546F" QFN-12-1EP_2x2mm_P0.5mm_EP1x1mm 95.3,33.32 r90 top
U3 "GT4227" GTIC_UQFN-10_1.4x1.8mm_P0.4mm 113.4,41.57 r90 top
U4 "RFFC5072" QFN-32-1EP_5x5mm_P0.5mm_EP3.7x3.7mm_ThermalVias 84.5,53.62 r270 top
U5 "FM8625H" TSLP-6-4_1.1x0.7mm_P0.4mm 94.85,52.62 r180 top
U6 "FM8625H" TSLP-6-4_1.1x0.7mm_P0.4mm 88.3,46.52 r90 top
U7 "FM8625H" TSLP-6-4_1.1x0.7mm_P0.4mm 94.8,44.97 r270 top
U8 "GT4227" GTIC_UQFN-10_1.4x1.8mm_P0.4mm 112.9,47.07 r0 top
U9 "MXD8638C" MXD8638C 87,34.92 r270 top
U10 "74LVC1G86" SOT-353_SC-70-5 95.3,28.02 r180 top
U11 "74LVC1G86" SOT-353_SC-70-5 87.3,28.02 r180 top
U12 "MXD8638C" MXD8638C 82.65,34.92 r90 top
U13 "74LVC1G86" SOT-353_SC-70-5 81.4,27.92 r180 top
U14 "MXD8638C" MXD8638C 76.05,34.92 r270 top
U15 "TVS_USB" Diodes_UDFN-10_1.0x2.5mm_P0.5mm 170.5,71.07 r180 top
U16 "ICE40UP5K" QFN-48-1EP_7x7mm_P0.5mm_EP5.6x5.6mm_ThermalVias 135.4,62.42 r90 top
U17 "MAX2831" QFN-48-1EP_7x7mm_P0.5mm_EP5.6x5.6mm_ThermalVias 104.3,35.02 r0 top
U18 "MAX5865" QFN-48-1EP_7x7mm_P0.5mm_EP5.3x5.3mm_ThermalVias 107.4,55.32 r90 top
U19 "SI5351C" QFN-20-1EP_4x4mm_P0.5mm_EP2.7x2.7mm_ThermalVias 125.7,32.22 r90 top
U20 "W25Q32" SOIC-8_5.3x5.3mm_P1.27mm 163.7,38.92 r180 top
U21 "TPS62410" Texas_S-PVSON-N10_ThermalVias 166.5,85.72 r90 top
U22 "LDO_2V5" SOT-23-3 141.7,70.32 r90 top
U23 "LPC4330FET180" TFBGA-180_12x12mm_Layout14x14_P0.8mm 152,45.82 r270 top